# Altium PCB PCB.PcbDoc
Units mm, origin at the board's own origin, x right, y up, seen from the top; angles counter-clockwise.
Board outline 50 x 50 mm, 6 copper layers (L1, L2, L3, L4, L5, L6), stack 0.816 mm thick; 41 components, 27 nets, 119 pads, 94 vias.
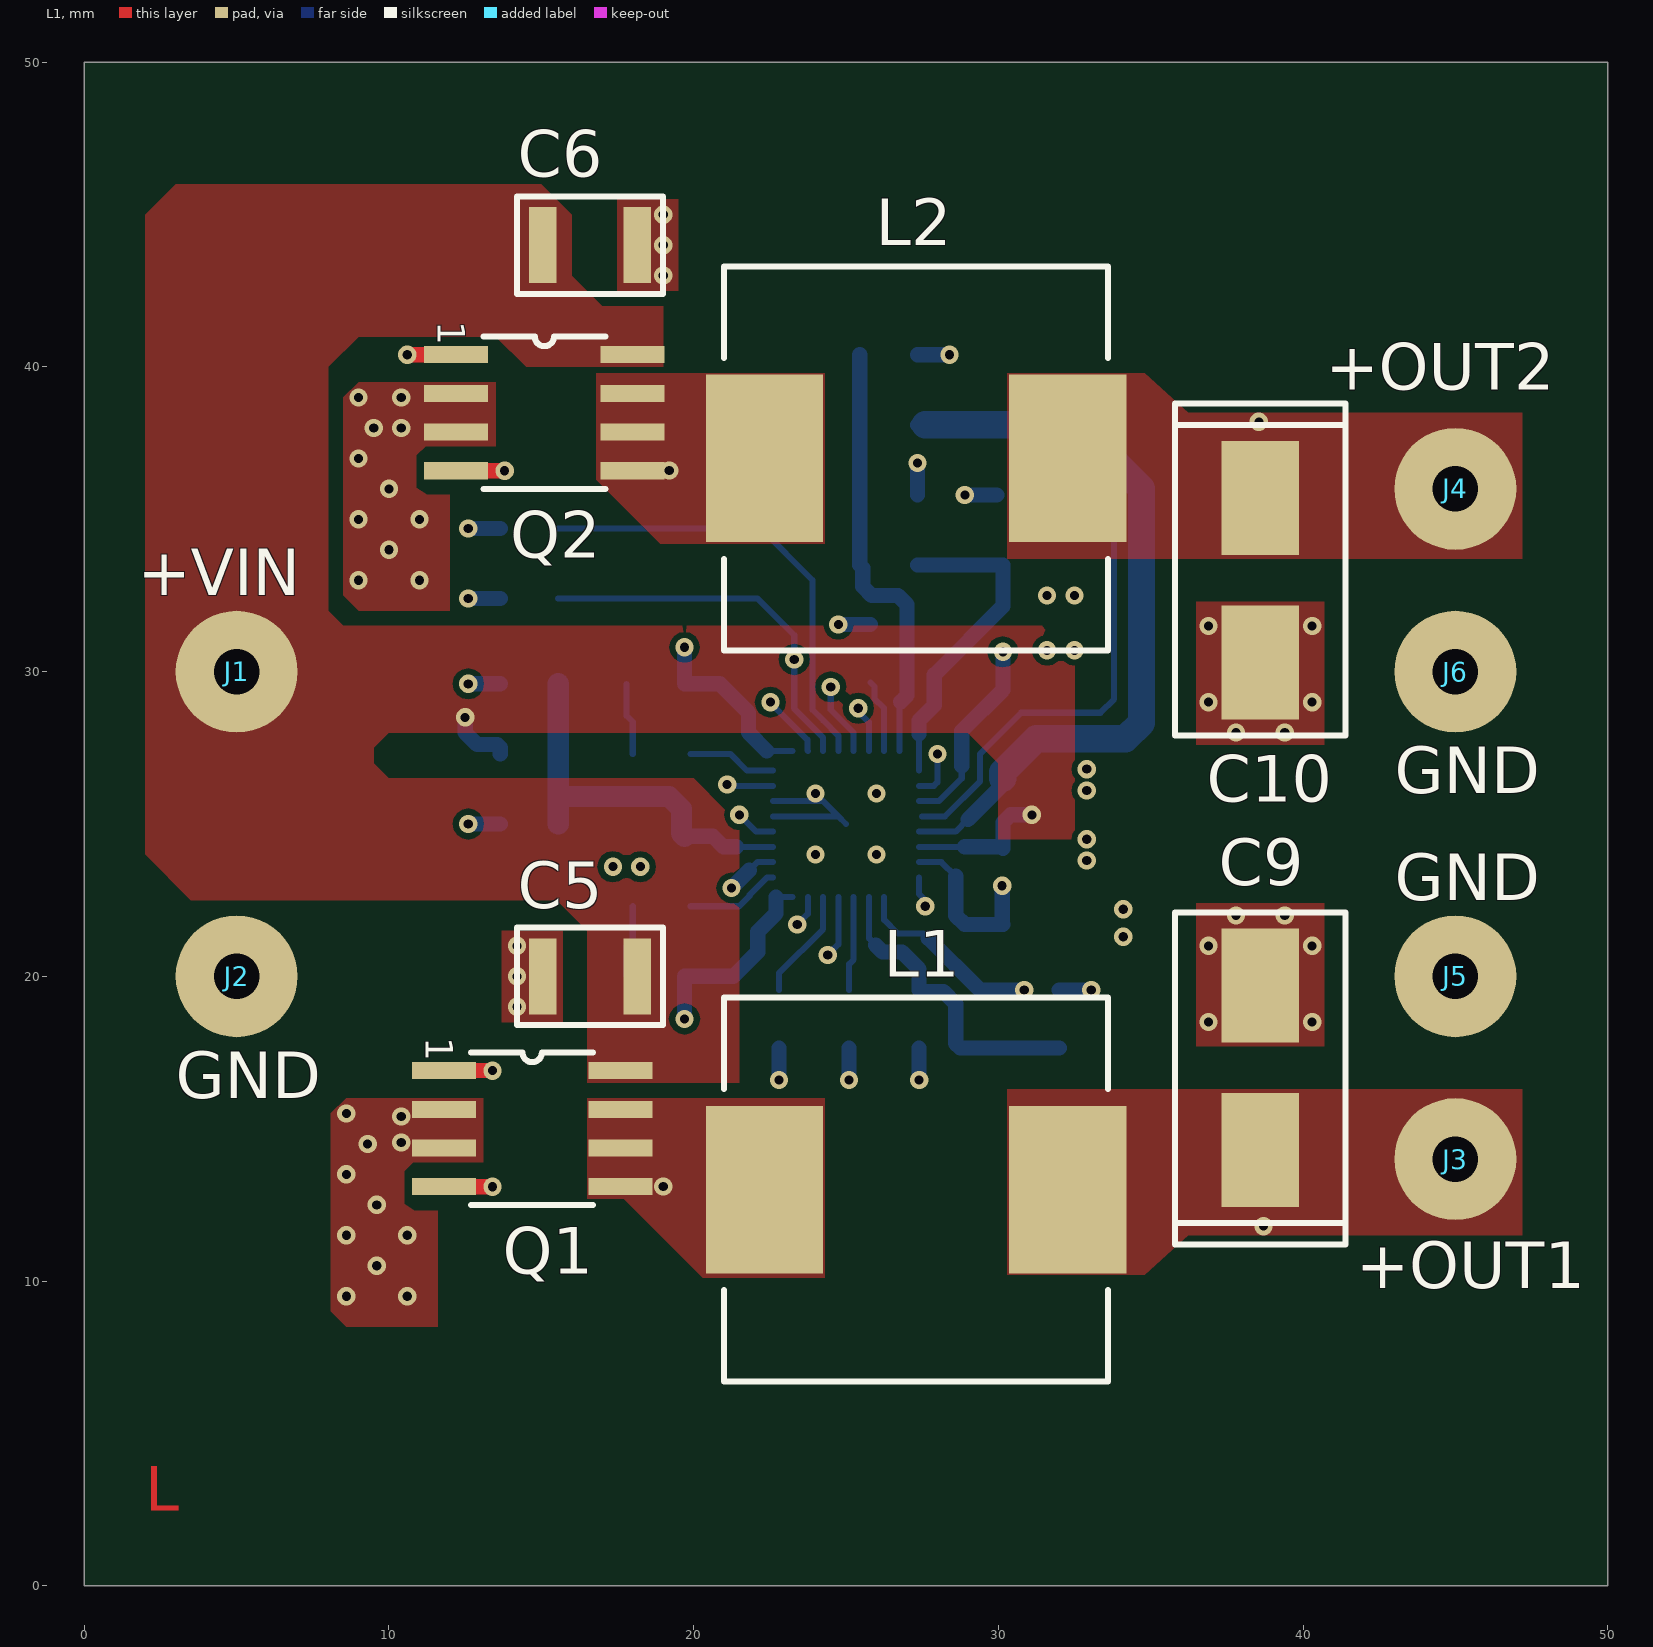
[diagram p0: L1 view]
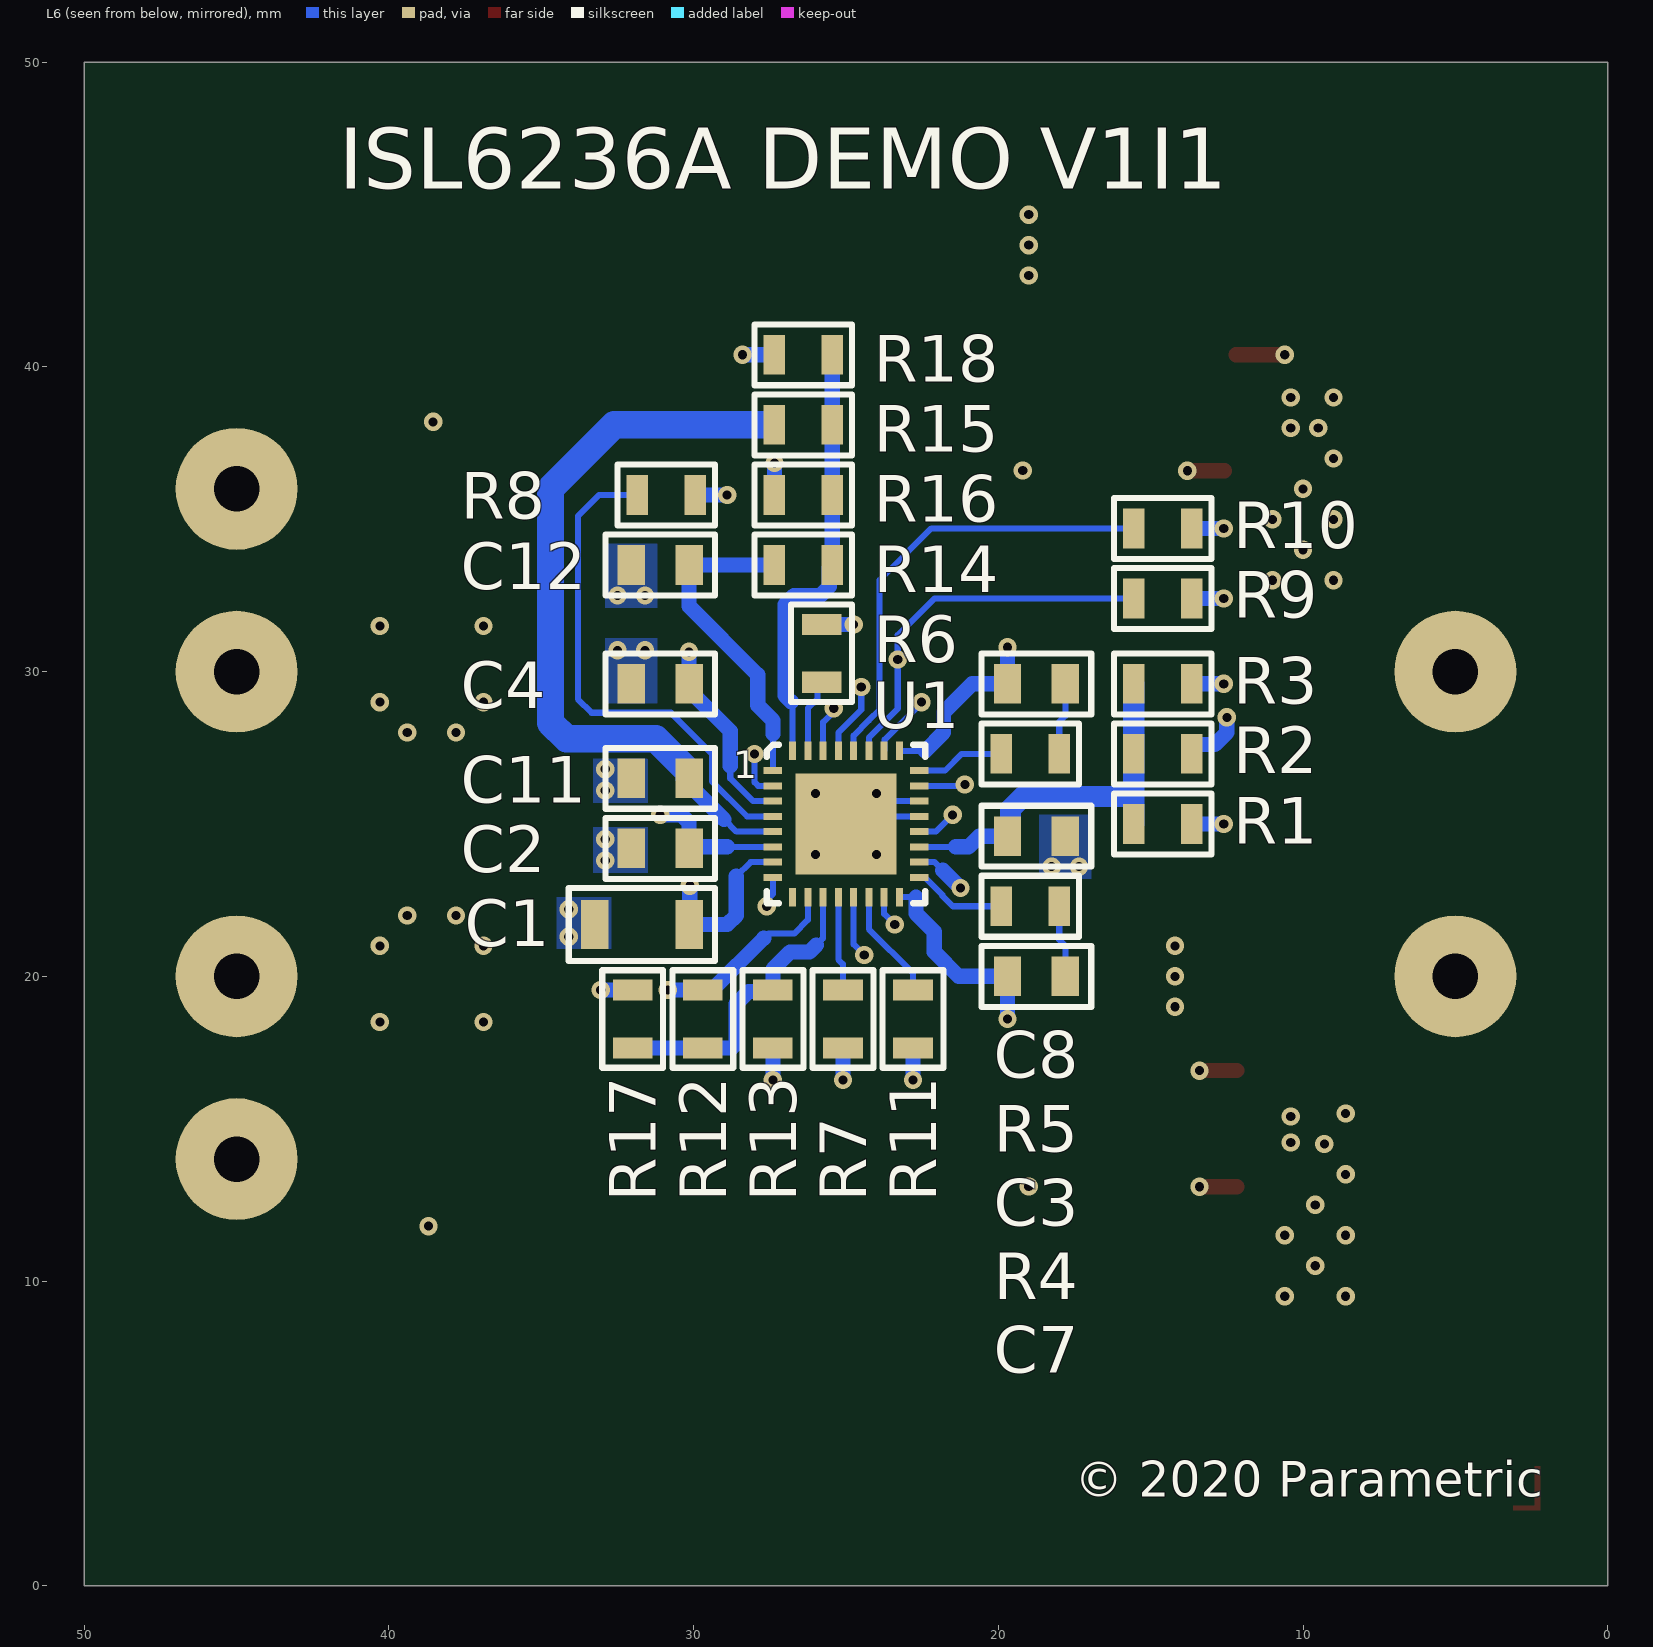
[diagram p1: L6 view, seen from below]
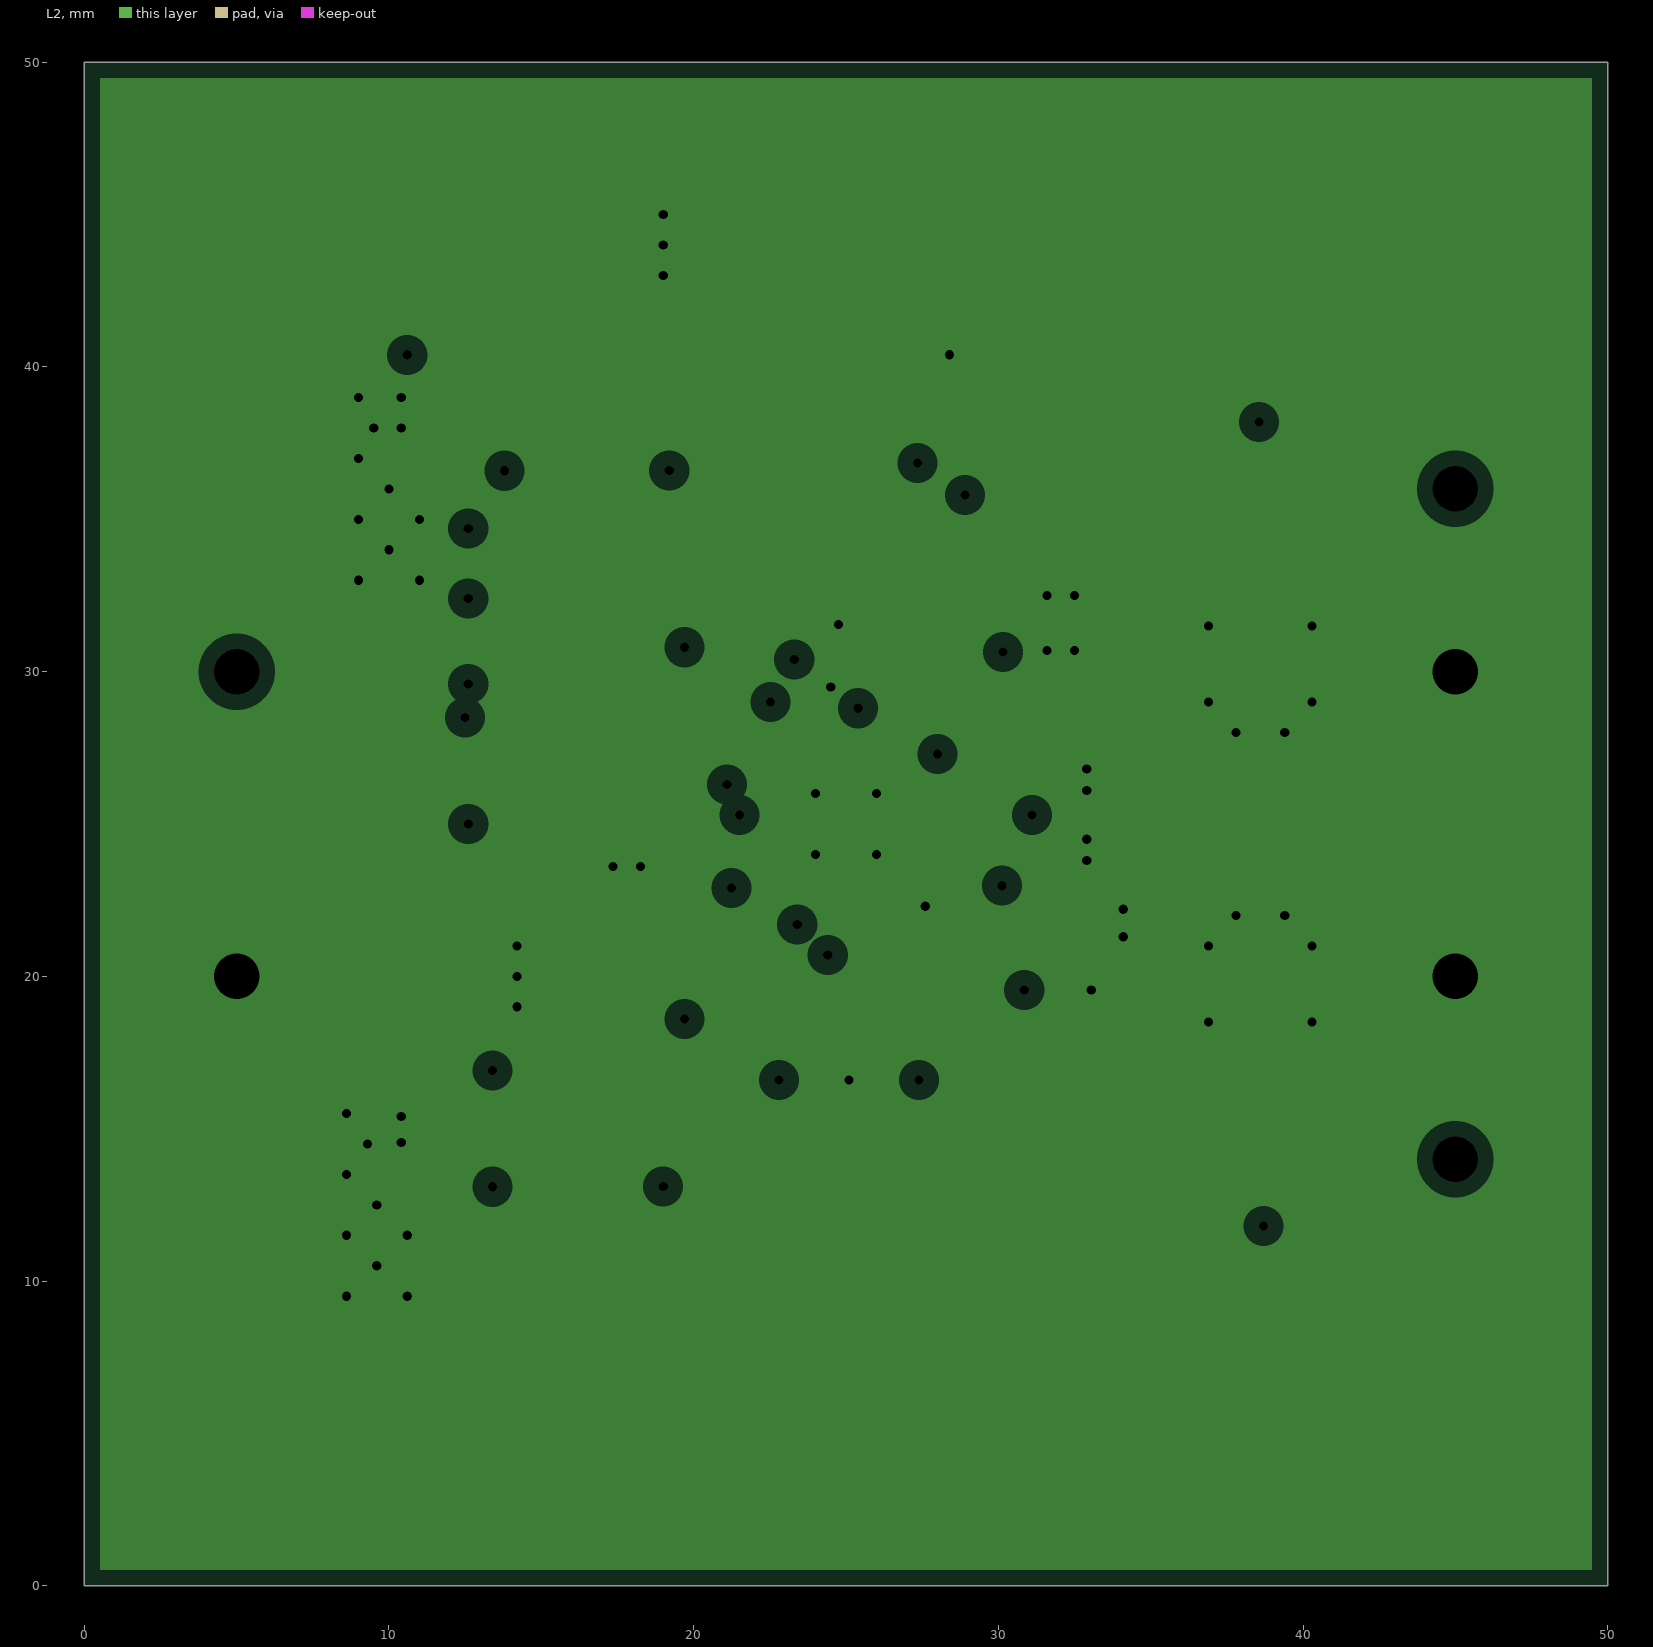
[diagram p2: L2, clearances drawn from the general rule]
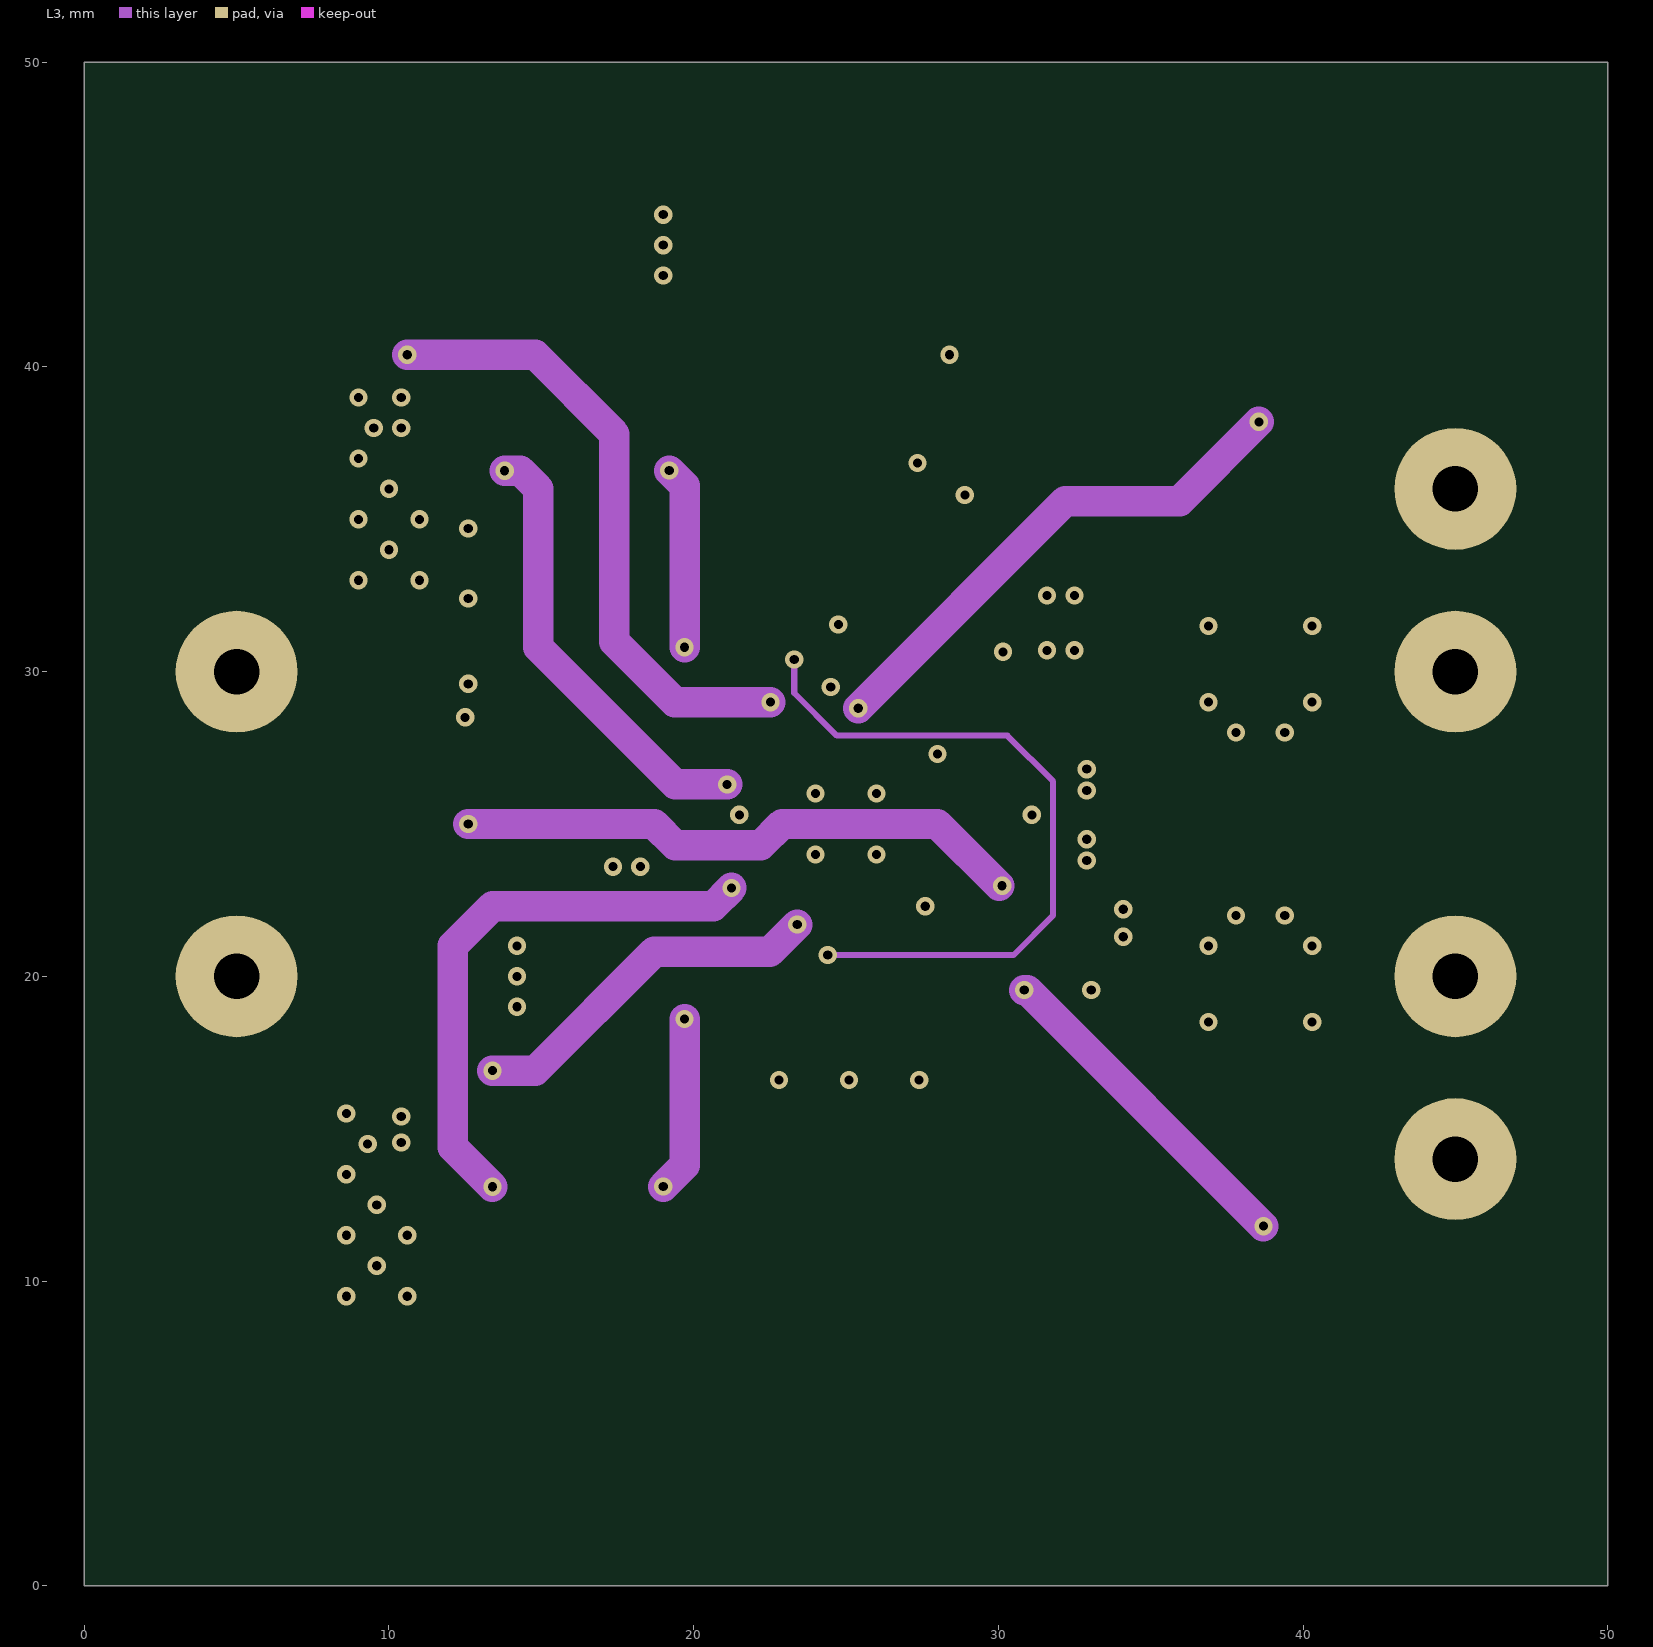
[diagram p3: L3]
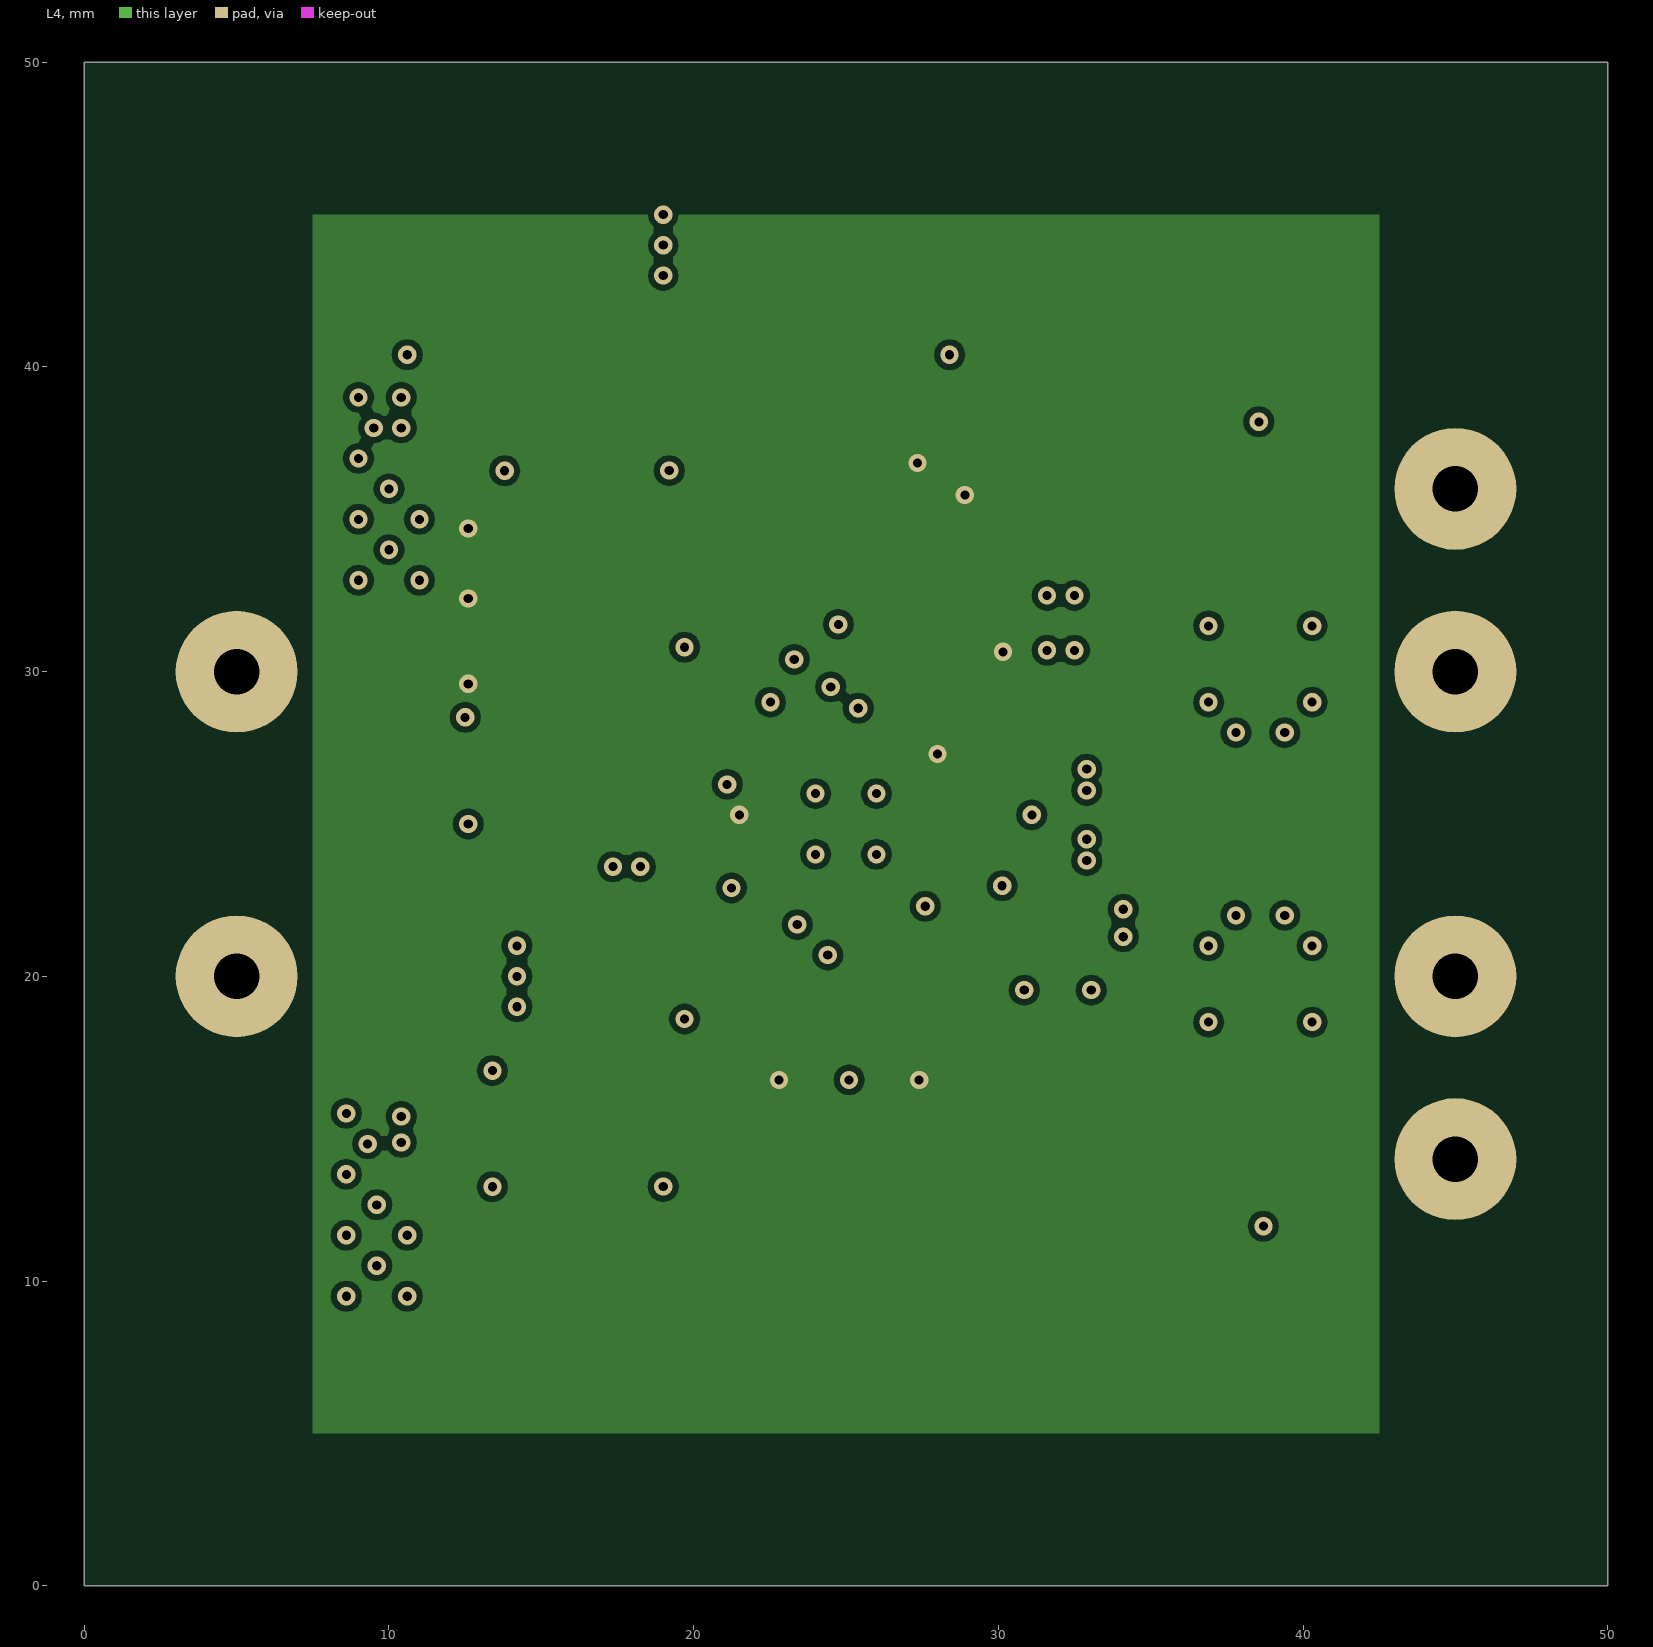
[diagram p4: L4]
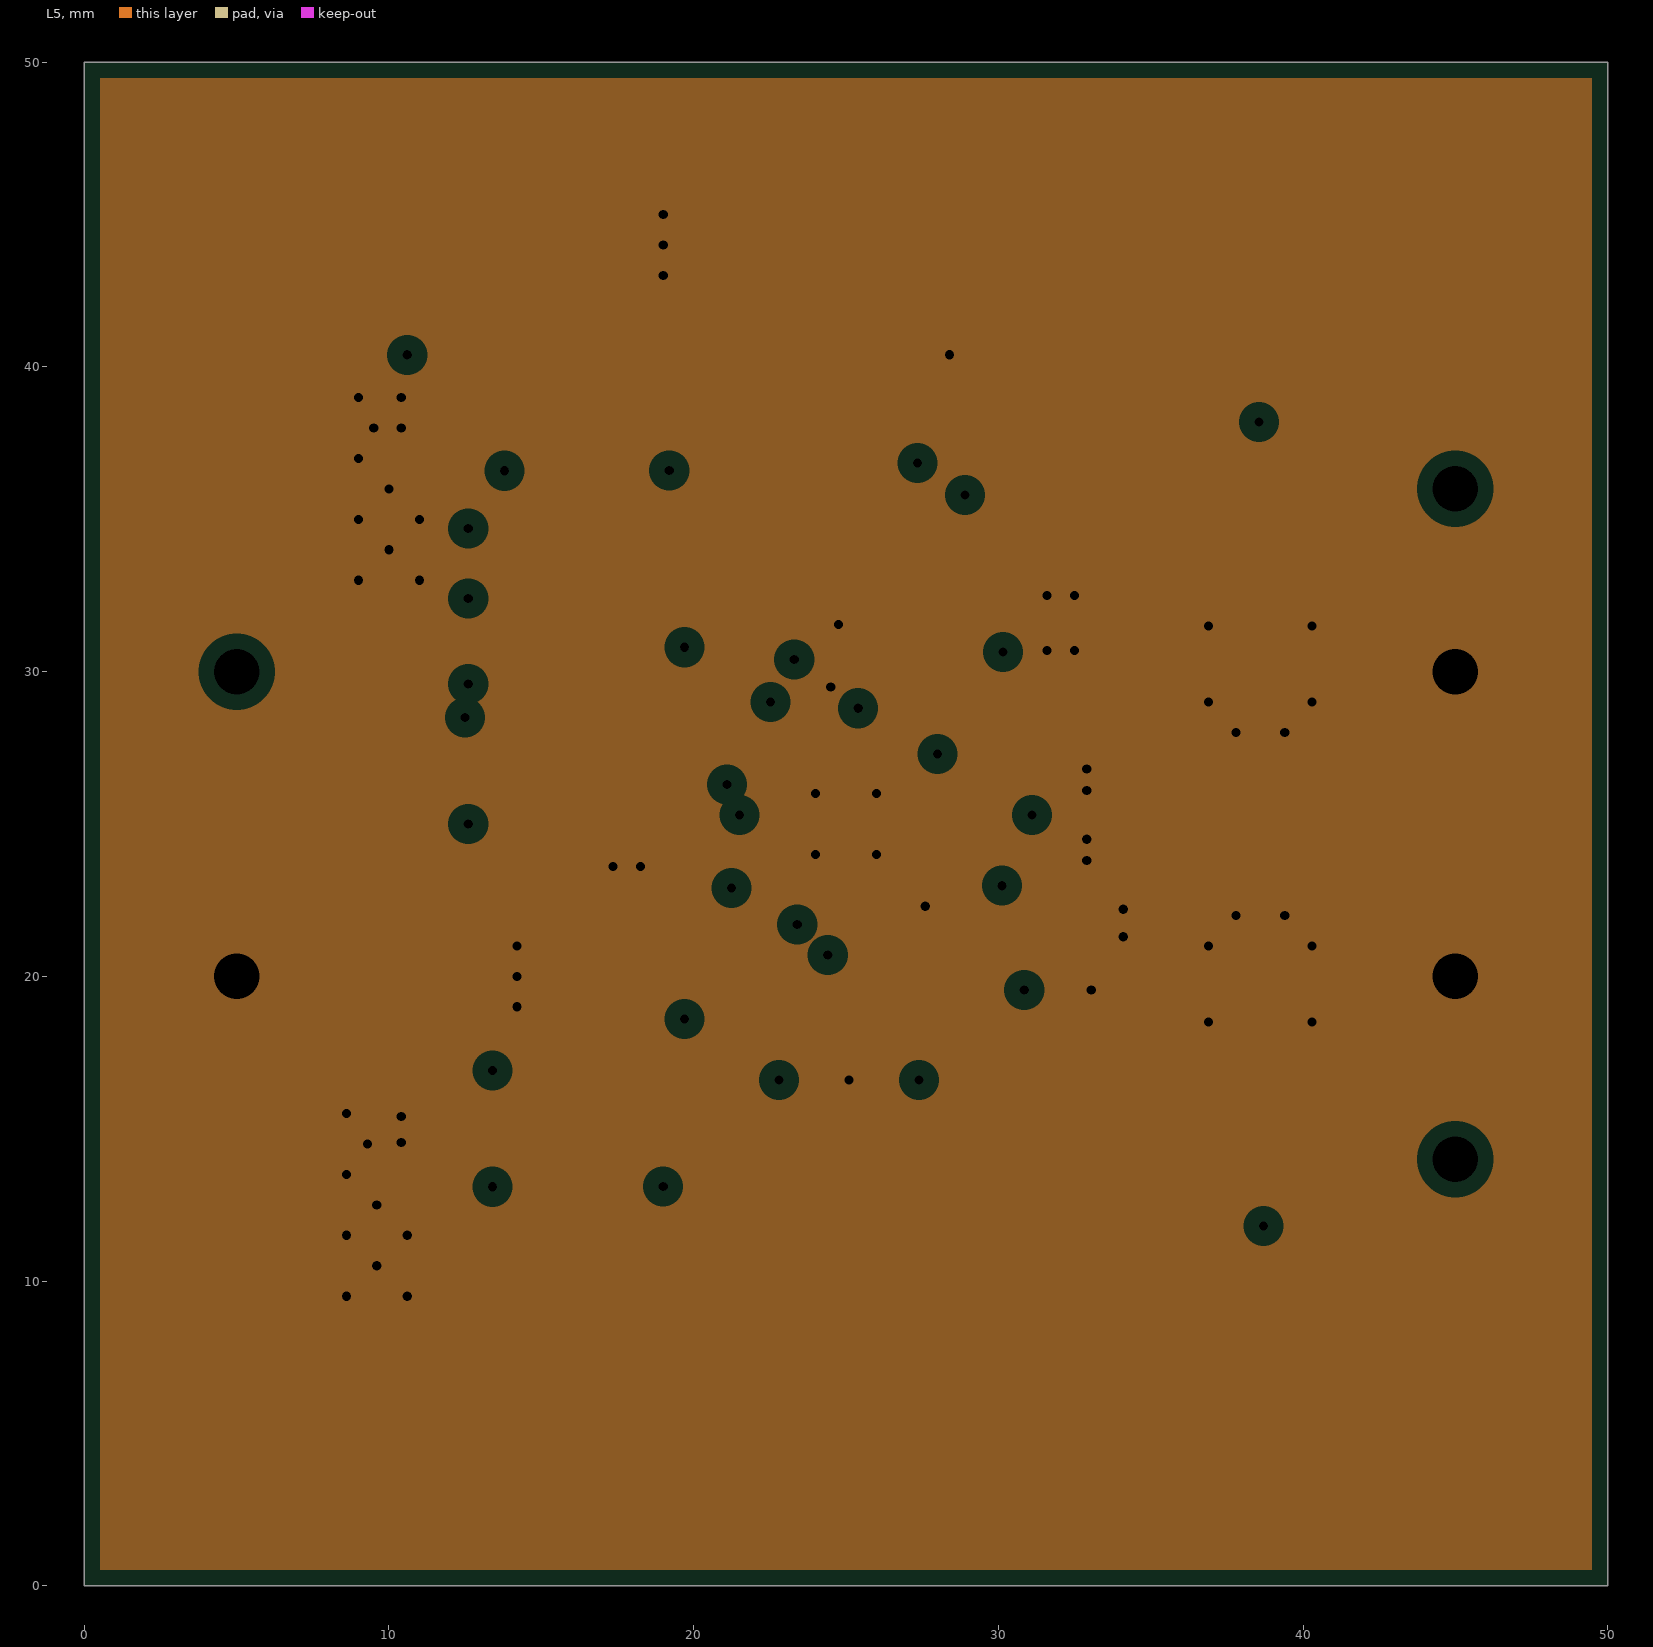
[diagram p5: L5, clearances drawn from the general rule]

## Layer stack, top to bottom
Top Solder: solder mask 0.0102, Solder Resist, Dk 3.5
L1: signal copper 0.0356
Dielectric 2: prepreg 0.0711, PP-006, Dk 4.1
L2: plane copper 0.035, net GND
Dielectric 4: prepreg 0.0711, PP-006, Dk 4.1
L3: signal copper 0.035
Dielectric 1: dielectric 0.32, FR-4, Dk 4.8
L4: signal copper 0.035
Dielectric 5: prepreg 0.0711, PP-006, Dk 4.1
L5: plane copper 0.035, net GND
Dielectric 3: prepreg 0.0711, PP-006, Dk 4.1
L6: signal copper 0.0356
Bottom Solder: solder mask 0.0102, Solder Resist, Dk 3.5

## Board outline
0,0 50,0 50,50 0,50

## Design rules (kind name [scope] priority, off if disabled: settings)
Clearance [All] p1: gap=0.2 ignorepadtopadclearanceinfootprint=FALSE
ComponentClearance [All] p1: gap=0.099 collisioncheckmode=3 verticalgap=0.254 showdistances=FALSE
MinimumSolderMaskSliver [All] p1: minsoldermaskwidth=0.1
PlaneClearance [All] p1: clearance=0.508
PlaneConnect [All] p1: pad.planeconnectstyle=Relief pad.reliefexpansion=0.508 pad.reliefentries=4 pad.reliefconductorwidth=1 pad.reliefairgap=0.5 via.planeconnectstyle=Direct via.reliefexpansion=0.508 via.reliefentries=4 via.reliefconductorwidth=0.254 via.reliefairgap=0.254
PolygonConnect [All] p1: connectstyle=Direct reliefconductorwidth=0.254 reliefentries=4 polygonreliefangle="90 Angle" airgapwidth=0.254
RoutingVias [All] p1: holewidth=0.3 width=0.6 viastyle="Through Hole" minholewidth=0.3 minwidth=0.6 maxholewidth=0.3 maxwidth=0.6
SilkToSolderMaskClearance [IsPad] p1: minsilkscreentomaskgap=0.1 clearancetoexposedcopper=TRUE
SolderMaskExpansion [All] p1: expansion=0.102 istentingtop=FALSE
Width [All] p1: maxlimit=10 minlimit=0.2 preferedwidth=0.2
25 further rules are at their usual default settings.

## Components (designator, comment, footprint, x,y, rotation, side; value= is the part's Value field where it differs from the comment)
C1 "4.7uF, 50V" C1206 31.7,21.7 r180 bottom
C2 "1uF 50V" C0805 31.1,24.2 r180 bottom
C3 "1uF 50V" C0805 18.75,24.6 r0 bottom
C4 "1uF 50V" C0805 31.1,29.6 r180 bottom
C5 "10uF, 35V" C1210 16.6,20 r0 top
C6 "10uF, 35V" C1210 16.6,44 r180 top
C7 "100nF" C0805 18.75,20 r180 bottom
C8 "220nF" C0805 18.75,29.6 r0 bottom
C9 "330uF, 10V" 7343-43 38.6,17 r90 top
C10 "330uF, 10V" 7343-43 38.6,33 r270 top
C11 "10nF" C0805 31.1,26.5 r0 bottom
C12 "100nF" C0805 31.1,33.5 r0 bottom
J1 "4MMx1.5MM" PAD_WITH_HOLE_4mmx1.5mm 5,30 r0 top
J2 "4MMx1.5MM" PAD_WITH_HOLE_4mmx1.5mm 5,20 r0 top
J3 "4MMx1.5MM" PAD_WITH_HOLE_4mmx1.5mm 45,14 r0 top
J4 "4MMx1.5MM" PAD_WITH_HOLE_4mmx1.5mm 45,36 r0 top
J5 "4MMx1.5MM" PAD_WITH_HOLE_4mmx1.5mm 45,20 r0 top
J6 "4MMx1.5MM" PAD_WITH_HOLE_4mmx1.5mm 45,30 r0 top
L1 "3.3uH, DR125-3R3-R" DR125 27.3,13 r180 top
L2 "2.2uH, 513-1662-1-ND" DR125 27.3,37 r0 top
Q1 "SI4816BDY-T1-E3" SO-8 14.7,15 r0 top
Q2 "SI4816BDY-T1-E3" SO-8 15.1,38.5 r0 top
R1 "0R" R0805 14.6,25 r180 bottom
R2 "0R" R0805 14.6,27.3 r0 bottom
R3 "10R" R0805 14.6,29.6 r180 bottom
R4 "1R" R0805 18.95,22.3 r0 bottom
R5 "1R" R0805 18.95,27.3 r180 bottom
R6 "200k" R0805 25.8,30.6 r90 bottom
R7 "200k" R0805 25.1,18.6 r90 bottom
R8 "10K" R0805 30.9,35.8 r180 bottom
R9 "200k" R0805 14.6,32.4 r180 bottom
R10 "200k" R0805 14.6,34.7 r180 bottom
R11 "10K" R0805 22.8,18.6 r270 bottom
R12 "DNF" R0805 29.7,18.6 r90 bottom
R13 "0R" R0805 27.4,18.6 r270 bottom
R14 "DNF" R0805 26.4,33.5 r0 bottom
R15 "0R" R0805 26.4,38.1 r0 bottom
R16 "DNF" R0805 26.4,35.8 r0 bottom
R17 "DNF" R0805 32,18.6 r270 bottom
R18 "DNF" R0805 26.4,40.4 r180 bottom
U1 "ISL6236AIRZ" L32.5x5B 25,25 r180 bottom

## Footprints (in the part's own frame and the unit in brackets; to place one, negate y for a bottom-side part, rotate by r counter-clockwise, add the part's x,y. Pads: shape width x height; smd on the part's side, far side on the other; paste and mask are expansions set on the pad)
7343-43 [mm]
  rect 3.75x2.55 smd: 1(-2.7,0) 2(2.7,0)
  silkscreen extent -5.8,-2.8 5.1,2.8
C0805 [mm]
  rect 0.9x1.3 smd: 1(-0.95,0) 2(0.95,0)
  silkscreen extent -1.8,-1 1.8,1
C1206 [mm]
  rect 0.9x1.6 smd: 1(-1.55,0) 2(1.55,0)
  silkscreen extent -2.4,-1.2 2.4,1.2
C1210 [mm]
  rect 0.9x2.5 smd: 1(-1.55,0) 2(1.55,0)
  silkscreen extent -2.4,-1.6 2.4,1.6
DR125 [mm]
  rect 3.85x5.5 smd: 1(-4.975,0) 2(4.975,0)
  silkscreen extent -6.3,-6.3 6.3,6.3
L32.5x5B [mm]
  rect 0.6x0.23 smd mask+0.051: 1(-2.4,1.75) 2(-2.4,1.25) 3(-2.4,0.75) 4(-2.4,0.25) 5(-2.4,-0.25) 6(-2.4,-0.75) 7(-2.4,-1.25) 8(-2.4,-1.75) 17(2.4,-1.75) 18(2.4,-1.25) 19(2.4,-0.75) 20(2.4,-0.25) 21(2.4,0.25) 22(2.4,0.75) 23(2.4,1.25) 24(2.4,1.75)
  rect 0.23x0.6 smd mask+0.051: 9(-1.75,-2.4) 10(-1.25,-2.4) 11(-0.75,-2.4) 12(-0.25,-2.4) 13(0.25,-2.4) 14(0.75,-2.4) 15(1.25,-2.4) 16(1.75,-2.4) 25(1.75,2.4) 26(1.25,2.4) 27(0.75,2.4) 28(0.25,2.4) 29(-0.25,2.4) 30(-0.75,2.4) 31(-1.25,2.4) 32(-1.75,2.4)
  rect 3.3x3.3 smd mask+0.051: 33(0,0)
  silkscreen extent -2.6,-2.6 2.6,2.6
PAD_WITH_HOLE_4mmx1.5mm [mm]
  round 4 hole 1.5: 1(0,0)
R0805 [mm]
  rect 0.7x1.3 smd: 1(-0.95,0) 2(0.95,0)
  silkscreen extent -1.6,-1 1.6,1
SO-8 [mm]
  rect 2.1x0.559 smd: 1(-2.9,1.905) 2(-2.9,0.635) 3(-2.9,-0.635) 4(-2.9,-1.905) 5(2.9,-1.905) 6(2.9,-0.635) 7(2.9,0.635) 8(2.9,1.905)
  silkscreen extent -2,-2.5 2,2.5

## Part data
C1: library part C3216X5R1H475K160AB, "C Series 1206 4.7 uF 50 V ±10 % Tolerance X5R SMT Multilayer Ceramic Capacitor", Capacitance=4.7uF, Case Code (Imperial)=1206, Case Code (Metric)=3216, Dielectric=X5R, Dielectric Material=Ceramic, Manufacturer=TDK, Max Operating Temperature=85°C, Min Operating Temperature=-55°C, Package Quantity=1, Supplier Part Number 1=445-5994-1-ND, Tolerance=10%, Voltage Rating=50V, Case/Package=1206, Category="Ceramic Capacitors", ComponentLink1Description=https://datasheet.ciiva.com/24216/c3216x5r1h475k160ab-265269-24216325.pdf?src-supplier=Mouser, ComponentLink1URL=https://datasheet.ciiva.com/24216/c3216x5r1h475k160ab-265269-24216325.pdf?src-supplier=Mouser, ComponentLink2Description=https://datasheet.ciiva.com/6286/tdkmlcccaprange-6286230.pdf?src-supplier=Digi-Key, ComponentLink2URL=https://datasheet.ciiva.com/6286/tdkmlcccaprange-6286230.pdf?src-supplier=Digi-Key, ComponentLink3Description=https://datasheet.ciiva.com/6286/tdkmlcccaprange-6286233.pdf?src-supplier=Digi-Key, ComponentLink3URL=https://datasheet.ciiva.com/6286/tdkmlcccaprange-6286233.pdf?src-supplier=Digi-Key, ComponentLink4Description=https://datasheet.ciiva.com/6286/tdkmlcccaprange-6286236.pdf?src-supplier=Digi-Key, ComponentLink4URL=https://datasheet.ciiva.com/6286/tdkmlcccaprange-6286236.pdf?src-supplier=Digi-Key, Composition=Ceramic, Depth=1.6mm, Height=1.6mm, Lead Free="Lead Free", Length=3.2mm, Manufacturer Part Number=C3216X5R1H475K160AB, Mount="Surface Mount", Packaging="Tape and Reel", Pricing 1="1=0.86000, 10=0.63500, 50=0.50820, 100=0.43560, 500=0.34486, 1000=0.29040 (USD)", RoHS=Yes, Stock 1=6706, Supplier 1=Digi-Key, Termination=SMD/SMT, Thickness=0.071inch, Voltage Rating (DC)=50V, Weight=0.000571oz, Width=1.6mm
C2 C3 C4: library part C0805C105K5RACTU, "CAP CER 1UF 50V X7R 0805", Capacitance=1uF, Case Code (Imperial)=0805, Case Code (Metric)=2012, Dielectric=X7R, Dielectric Material=Ceramic, Manufacturer=KEMET, Max Operating Temperature=125°C, Min Operating Temperature=-55°C, Package Quantity=1, Supplier Part Number 1=399-7409-1-ND, Tolerance=10%, Voltage=50V, Case/Package=0805, Category="Ceramic Capacitors", ComponentLink1Description=https://datasheet.ciiva.com/7842/1732744-7842192.pdf?src-supplier=Element14, ComponentLink1URL=https://datasheet.ciiva.com/7842/1732744-7842192.pdf?src-supplier=Element14, ComponentLink2Description=https://datasheet.ciiva.com/5408/kem-c1002-x7r-smd-5408569.pdf?src-supplier=Mouser, ComponentLink2URL=https://datasheet.ciiva.com/5408/kem-c1002-x7r-smd-5408569.pdf?src-supplier=Mouser, ComponentLink3Description=https://datasheet.ciiva.com/22700/1851736-22700523.pdf?src-supplier=Element14, ComponentLink3URL=https://datasheet.ciiva.com/22700/1851736-22700523.pdf?src-supplier=Element14, Contact Plating=Tin,Matte, Depth=1.25mm, Height=1.25mm, Length=2mm, Manufacturer Part Number=C0805C105K5RACTU, Mount="Surface Mount,PCB", Packaging="Tape and Reel", Pricing 1="1=0.38000, 10=0.26500, 50=0.18540, 100=0.15900, 500=0.11924, 1000=0.10070 (USD)", REACH SVHC="No SVHC", RoHS=Yes, Stock 1=143406, Supplier 1=Digi-Key, Termination=SMD/SMT, Thickness=0.055inch, Voltage Rating=50V, Voltage Rating (DC)=50V, Width=0.049inch
C5 C6: library part C1210C106K6PACTU, "KEMET - C1210C106K6PACTU - SMD Multilayer Ceramic Capacitor, 10 µF, 35 V, 1210 [3225 Metric], ± 10%, X5R, C Series KEMET", Capacitance=10uF, Case Code (Imperial)=1210, Case Code (Metric)=3225, Dielectric=X5R, Dielectric Material=Ceramic, Manufacturer=KEMET, Max Operating Temperature=85°C, Min Operating Temperature=-55°C, Supplier Part Number 1=399-12070-1-ND, Tolerance=10%, Voltage=35V, Case/Package=1210, Category="Ceramic Capacitors", ComponentLink1Description=http://www.alliedelec.com/m/d/f3c02ddb98afa3dd1adcb801109671e9.pdf?src-supplier=Allied+Electronics, ComponentLink1URL=http://www.alliedelec.com/m/d/f3c02ddb98afa3dd1adcb801109671e9.pdf?src-supplier=Allied+Electronics, ComponentLink2Description=http://www.farnell.com/datasheets/2741192.pdf?src-supplier=Farnell, ComponentLink2URL=http://www.farnell.com/datasheets/2741192.pdf?src-supplier=Farnell, ComponentLink3Description=https://api.kemet.com/component-edge/download/datasheet/C1210C106K6PAC7800.pdf?src-supplier=Digi-Key, ComponentLink3URL=https://api.kemet.com/component-edge/download/datasheet/C1210C106K6PAC7800.pdf?src-supplier=Digi-Key, ComponentLink4Description=http://www.farnell.com/datasheets/2741192.pdf?src-supplier=Newark, ComponentLink4URL=http://www.farnell.com/datasheets/2741192.pdf?src-supplier=Newark, ComponentLink5Description=http://www.kemet.com/docfinder?Partnumber=C1210C106K6PAC7800&src-supplier=Digi-Key, ComponentLink5URL=http://www.kemet.com/docfinder?Partnumber=C1210C106K6PAC7800&src-supplier=Digi-Key, Depth=2.5mm, Dissipation Factor=2.5%, Height=1.9mm, Lead Free="Lead Free", Length=0.126inch, Manufacturer Part Number=C1210C106K6PACTU, Mount="Surface Mount", Packaging="Tape and Reel", Pricing 1="1=0.78000, 10=0.57700, 50=0.46180, 100=0.39580, 500=0.31336, 1000=0.26388 (USD)", RoHS=Yes, Stock 1=38018, Supplier 1=Digi-Key, Termination=Solder, Thickness=0.083inch, Voltage Rating=35V, Voltage Rating (DC)=35V, Width=0.098inch
C7 C12: library part C0805C104K5RACTU, "Cap Ceramic 0.1uF 50V X7R 10% SMD 2.0 x 1.2 mm 125 C Paper T/R", Case Code (Imperial)=0805, Case Code (Metric)=2012, Dielectric=X7R, Dielectric Material=Ceramic, Manufacturer=KEMET, Max Operating Temperature=125°C, Min Operating Temperature=-55°C, Package Quantity=4000, Supplier Part Number 1=399-1170-1-ND, Tolerance=10%, Voltage=500V, Voltage Rating=50V, Capacitance=100nF, Case/Package=0805, Category="Ceramic Capacitors", ComponentLink1Description=https://datasheet.ciiva.com/14589/70095383-14589048.pdf?src-supplier=Allied+Electronics, ComponentLink1URL=https://datasheet.ciiva.com/14589/70095383-14589048.pdf?src-supplier=Allied+Electronics, ComponentLink2Description=https://datasheet.ciiva.com/28682/1851736-28682232.pdf?src-supplier=Element14, ComponentLink2URL=https://datasheet.ciiva.com/28682/1851736-28682232.pdf?src-supplier=Element14, ComponentLink3Description=https://datasheet.ciiva.com/32431/slceramic-chip-condensers-e-32431755.pdf?src-supplier=Distrelec, ComponentLink3URL=https://datasheet.ciiva.com/32431/slceramic-chip-condensers-e-32431755.pdf?src-supplier=Distrelec, ComponentLink4Description=https://datasheet.ciiva.com/18410/70095383-18410815.pdf?src-supplier=Allied+Electronics, ComponentLink4URL=https://datasheet.ciiva.com/18410/70095383-18410815.pdf?src-supplier=Allied+Electronics, Contact Plating=Tin,Matte, Depth=1.25mm, Height=0.9mm, Lead Pitch=0.75mm, Length=2mm, Manufacturer Part Number=C0805C104K5RACTU, Mount="Surface Mount,PCB", Number of Pins=2, Packaging="Tape and Reel", Pricing 1="1=0.16000, 10=0.11500, 50=0.06540, 100=0.05420, 500=0.03802, 1000=0.03147 (USD)", Radiation Hardening=No, REACH SVHC="No SVHC", RoHS=Yes, Stock 1=2631110, Supplier 1=Digi-Key, Termination=SMD/SMT, Thickness=0.035inch, Voltage Rating (DC)=50V, Width=1.2mm
C8: library part C0805C224K5RACTU, "CAP CER 0.22UF 50V X7R 0805", Case Code (Imperial)=0805, Case Code (Metric)=2012, Dielectric=X7R, Dielectric Material=Ceramic, Manufacturer=KEMET, Max Operating Temperature=125°C, Min Operating Temperature=-55°C, Package Quantity=1, Supplier Part Number 1=399-3491-6-ND, Tolerance=10%, Voltage=50V, Capacitance=220nF, Case/Package=0805, Category="Ceramic Capacitors", ComponentLink1Description=https://datasheet.ciiva.com/7842/kem-c1002-x7r-smd-7842582.pdf?src-supplier=Element14, ComponentLink1URL=https://datasheet.ciiva.com/7842/kem-c1002-x7r-smd-7842582.pdf?src-supplier=Element14, ComponentLink2Description=https://datasheet.ciiva.com/18193/getdatasheetpartid-304413-18193686.pdf?src-supplier=Verical, ComponentLink2URL=https://datasheet.ciiva.com/18193/getdatasheetpartid-304413-18193686.pdf?src-supplier=Verical, ComponentLink3Description=https://datasheet.ciiva.com/28682/1851736-28682316.pdf?src-supplier=Element14, ComponentLink3URL=https://datasheet.ciiva.com/28682/1851736-28682316.pdf?src-supplier=Element14, Depth=1.25mm, Dissipation Factor=2.5%, Height=1.1mm, Lead Pitch=0.75mm, Length=2mm, Manufacturer Part Number=C0805C224K5RACTU, Mount="Surface Mount,PCB", Packaging="Tape and Reel", Pricing 1="1=0.19000, 10=0.13300, 50=0.07560, 100=0.06260, 500=0.04392, 1000=0.03636 (USD)", Radiation Hardening=No, REACH SVHC="No SVHC", RoHS=Yes, Stock 1=971801, Supplier 1=Digi-Key, Termination=SMD/SMT, Thickness=0.055inch, Voltage Rating=50V, Voltage Rating (DC)=50V, Width=0.049inch
C9 C10: library part T530X337M010ATE004, "Tantalum Capacitors - Polymer SMD 330uF 10volts 20%", Capacitance=330uF, Case Code (Imperial)=2917, Case Code (Metric)=7343, ESR (Equivalent Series Resistance)=4mR, Leakage Current=330uA, Manufacturer=KEMET, Max Operating Temperature=125°C, Min Operating Temperature=-55°C, Package Quantity=500, Ripple Current=8.2A, Supplier Part Number 1=399-10378-1-ND, Tolerance=20%, Voltage=10V, Case/Package=2917, Category="Polymer Capacitors", ComponentLink1Description=https://datasheet.ciiva.com/11794/0900766b80deaa91-11794477.pdf?src-supplier=RSComponents, ComponentLink1URL=https://datasheet.ciiva.com/11794/0900766b80deaa91-11794477.pdf?src-supplier=RSComponents, ComponentLink2Description=https://datasheet.ciiva.com/14593/70096008-14593753.pdf?src-supplier=Allied+Electronics, ComponentLink2URL=https://datasheet.ciiva.com/14593/70096008-14593753.pdf?src-supplier=Allied+Electronics, Depth=4.3mm, Dissipation Factor=8%, Features="General Purpose", Height=4mm, Height - Seated (Max)=0.169inch, Length=7.3mm, Life (Hours)=2000Hour, Manufacturer Part Number=T530X337M010ATE004, Mount="Surface Mount,PCB", Packaging="Tape and Reel", Polarity=Polar, Pricing 1="1=6.56000, 10=5.83000, 50=5.10120, 100=4.66400 (USD)", REACH SVHC="No SVHC", RoHS=Yes, Stock 1=1977, Supplier 1=Digi-Key, Termination=SMD/SMT, Voltage Rating=10V, Voltage Rating (DC)=10V, Width=4.3mm
C11: library part C0805F103K5RACTU, "KEMET - C0805F103K5RACTU - SMD Multilayer Ceramic Capacitor, FO-CAP, 10000 pF, 50 V, 0805 [2012 Metric], ± 10%, X7R", Case Code (Imperial)=0805, Case Code (Metric)=2012, Dielectric=X7R, Dielectric Material=Ceramic, Manufacturer=KEMET, Max Operating Temperature=125°C, Min Operating Temperature=-55°C, Package Quantity=4000, Supplier Part Number 1=399-5107-1-ND, Tolerance=10%, Voltage=50V, Capacitance=10nF, Case/Package=0805, Category="Ceramic Capacitors", ComponentLink1Description=https://datasheet.ciiva.com/146/docfinderpartnumber-c0805f103k5ractu-146278.pdf?src-supplier=Digi-Key, ComponentLink1URL=https://datasheet.ciiva.com/146/docfinderpartnumber-c0805f103k5ractu-146278.pdf?src-supplier=Digi-Key, ComponentLink2Description=https://datasheet.ciiva.com/7842/48829-7842407.pdf?src-supplier=Element14, ComponentLink2URL=https://datasheet.ciiva.com/7842/48829-7842407.pdf?src-supplier=Element14, ComponentLink3Description=https://datasheet.ciiva.com/7842/48829-7842408.pdf?src-supplier=Element14, ComponentLink3URL=https://datasheet.ciiva.com/7842/48829-7842408.pdf?src-supplier=Element14, Depth=1.25mm, Height=0.9mm, Lead Pitch=0.75mm, Length=2mm, Manufacturer Part Number=C0805F103K5RACTU, Mount="Surface Mount", Number of Pins=2, Packaging="Tape and Reel", Pricing 1="1=0.33000, 10=0.22600, 50=0.15800, 100=0.13550, 500=0.10162, 1000=0.08580 (USD)", Radiation Hardening=No, REACH SVHC="No SVHC", RoHS=Yes, Stock 1=93831, Supplier 1=Digi-Key, Termination=SMD/SMT, Thickness=0.039inch, Voltage Rating=50V, Voltage Rating (DC)=50V, Width=1.25mm
J1 J2 J3 J4 J5 J6: library part PAD_WITH_HOLE_4mmx1.5mm, "Pad with a hole 4mm x 1.5mm"
L1: library part DR125-3R3-R, "COILTRONICS         DR125-3R3-R             Surface Mount Power Inductor, DR Series, 3.3 H, 9.26 A, 12.7 A, Shielded", Case/Package=0125, DC Resistance (DCR)=6.3mR, Inductance=3.3uH, Inductance Tolerance=20%, Manufacturer="Eaton Coiltronics", Max DC Current=12.7A, Max Operating Temperature=125°C, Min Operating Temperature=-40°C, Package Quantity=600, RMS Current (Irms)=9.26A, Self Resonant Frequency=100kHz, Supplier Part Number 1=513-1529-1-ND, Category="Fixed Inductors", ComponentLink1Description=https://datasheet.ciiva.com/46609/87246-46609257.pdf?src-supplier=Element14, ComponentLink1URL=https://datasheet.ciiva.com/46609/87246-46609257.pdf?src-supplier=Element14, Core Material=Ferrite, Depth=12.5mm, Height=6mm, Lead Free="Lead Free", Length=12.5mm, Manufacturer Part Number=DR125-3R3-R, Military Standard=Not, Mount="Surface Mount", Number of Pins=2, Packaging="Tape and Reel", Pricing 1="1=1.86000, 10=1.71900, 25=1.57560, 50=1.34640, 100=1.20320, 250=1.03132 (USD)", Radiation Hardening=No, REACH SVHC="No SVHC", RoHS=Yes, Saturation Current=12.7A, Shielding=Shielded, Stock 1=1813, Supplier 1=Digi-Key, Termination=SMD/SMT, Test Frequency=100kHz, Tolerance=20%, Weight=0.144oz, Width=12.5mm
L2: library part DR125-2R2-R, "FIXED IND 2.2UH 10.9A 4.5 MOHM", Case/Package=Nonstandard, Current Rating=10.9A, DC Resistance (DCR)=4.5mR, Inductance=2.2uH, Inductance Tolerance=20%, Manufacturer="Eaton Cooper", Max Operating Temperature=125°C, Min Operating Temperature=-40°C, Package Quantity=600, Saturation Current=15A, Self Resonant Frequency=100kHz, Supplier Part Number 1=DR125-2R2-R-CUTT, Category="Fixed Inductors", ComponentLink1Description=https://datasheet.ciiva.com/14667/0900766b8116a153-14667792.pdf?src-supplier=RSComponents, ComponentLink1URL=https://datasheet.ciiva.com/14667/0900766b8116a153-14667792.pdf?src-supplier=RSComponents, ComponentLink2Description=https://datasheet.ciiva.com/26926/getdatasheetpartid-571249-26926912.pdf?src-supplier=Verical, ComponentLink2URL=https://datasheet.ciiva.com/26926/getdatasheetpartid-571249-26926912.pdf?src-supplier=Verical, ComponentLink3Description=https://datasheet.ciiva.com/8004/87246-8004874.pdf?src-supplier=Element14, ComponentLink3URL=https://datasheet.ciiva.com/8004/87246-8004874.pdf?src-supplier=Element14, Composition=Wirewound, Core Material=Ferrite, DC Current=10.9A, Depth=12.5mm, Height=6mm, Height - Seated (Max)=0.236inch, Lead Free="Lead Free", Length=12.5mm, Manufacturer Part Number=DR125-2R2-R, Max DC Current=10.9A, Military Standard=Not, Mount="Surface Mount", Number of Pins=2, Packaging="Tape and Reel", Pricing 1="1=2.17000, 25=1.69000, 50=1.60000, 100=1.52000, 250=1.41000 (USD)", Radiation Hardening=No, REACH SVHC="No SVHC", RMS Current (Irms)=10.9A, RoHS=Yes, Shielding=Shielded, Stock 1=700, Supplier 1="Future Electronics", Termination=SMD/SMT, Test Frequency=100kHz, Tolerance=20%, Weight=0.144oz, Width=0.492inch
Q1 Q2: "MOSFET 2N-CH 30V 5.8A 8-SOIC", Case/Package=SO, Continuous Drain Current (ID)=8.2A, Drain to Source Resistance=11.5mR, Drain to Source Voltage (Vdss)=30V, Gate to Source Voltage (Vgs)=20V, Manufacturer="Vishay Siliconix", Max Operating Temperature=150°C, Max Power Dissipation=1.25W, Min Operating Temperature=-55°C, On-State Resistance=18.5mR, Package Quantity=1, Supplier Part Number 1=SI4816BDY-T1-E3CT-ND, Threshold Voltage=1V, Category=MOSFETs, ComponentLink1Description=https://datasheet.ciiva.com/15137/getdatasheetpartid-99188-15137841.pdf?src-supplier=Verical, ComponentLink1URL=https://datasheet.ciiva.com/15137/getdatasheetpartid-99188-15137841.pdf?src-supplier=Verical, ComponentLink2Description=https://datasheet.ciiva.com/7710/si4816bd-7710449.pdf?src-supplier=Element14, ComponentLink2URL=https://datasheet.ciiva.com/7710/si4816bd-7710449.pdf?src-supplier=Element14, ComponentLink3Description=https://datasheet.ciiva.com/26789/si4816bdy-t1-e3-26789112.pdf?src-supplier=IIIC, ComponentLink3URL=https://datasheet.ciiva.com/26789/si4816bdy-t1-e3-26789112.pdf?src-supplier=IIIC, ComponentLink4Description=https://datasheet.ciiva.com/11161/si4816bd-11161496.pdf?src-supplier=Avnet, ComponentLink4URL=https://datasheet.ciiva.com/11161/si4816bd-11161496.pdf?src-supplier=Avnet, ComponentLink5Description=https://datasheet.ciiva.com/928/si4816bd-928460.pdf?src-supplier=Digi-Key, ComponentLink5URL=https://datasheet.ciiva.com/928/si4816bd-928460.pdf?src-supplier=Digi-Key, ComponentLink6Description=https://datasheet.ciiva.com/16486/si4816bd-16486349.pdf?src-supplier=Future+Electronics, ComponentLink6URL=https://datasheet.ciiva.com/16486/si4816bd-16486349.pdf?src-supplier=Future+Electronics, ComponentLink7Description=https://datasheet.ciiva.com/26136/si4816bd-26136990.pdf?src-supplier=Avnet+Europe, ComponentLink7URL=https://datasheet.ciiva.com/26136/si4816bd-26136990.pdf?src-supplier=Avnet+Europe, ComponentLink8Description=https://datasheet.ciiva.com/18448/70026226-18448822.pdf?src-supplier=Allied+Electronics, ComponentLink8URL=https://datasheet.ciiva.com/18448/70026226-18448822.pdf?src-supplier=Allied+Electronics, ComponentLink9Description=https://datasheet.ciiva.com/928/si4816bd-928458.pdf?src-supplier=Digi-Key, ComponentLink9URL=https://datasheet.ciiva.com/928/si4816bd-928458.pdf?src-supplier=Digi-Key, ComponentLink10Description=https://datasheet.ciiva.com/928/si4816bd-928459.pdf?src-supplier=Digi-Key, ComponentLink10URL=https://datasheet.ciiva.com/928/si4816bd-928459.pdf?src-supplier=Digi-Key, Element Configuration=Single, Fall Time=9ns, FET Type="2 N-Channel", Height=1.55mm, Lead Free="Lead Free", Length=5mm, Manufacturer Part Number=SI4816BDY-T1-E3, Mount="Surface Mount", Nominal Vgs=3V, Number of Channels=2, Number of Elements=2, Number of Pins=8, Packaging="Tape and Reel", Pricing 1="1=1.56000, 10=1.40500, 25=1.32520, 100=1.03350, 500=0.87450, 1000=0.74200 (USD)", Radiation Hardening=No, Rds On Max=18.5mR, REACH SVHC=Unknown, Rise Time=9ns, RoHS=Yes, Stock 1=4053, Supplier 1=Digi-Key, Turn-Off Delay Time=31ns, Turn-On Delay Time=13ns, Weight=0.006596oz, Width=4mm
R1 R2 R13 R15: library part AC0805JR-070RL, "Thick Film Resistors - SMD 1/8W 0.0ohm 5%", Case Code (Imperial)=0805, Case Code (Metric)=2012, Manufacturer=Yageo, Max Operating Temperature=155°C, Max Power Dissipation=125mW, Min Operating Temperature=-55°C, Resistance=0mR, Supplier Part Number 1=YAG3755CT-ND, Temperature Coefficient=200ppm/°C, Tolerance=5%, Voltage Rating=150V, Case/Package=0805, Category="Chip SMD Resistors", ComponentLink1Description=http://www.yageo.com/documents/recent/PYu-AC_51_RoHS_L_2.pdf?src-supplier=Mouser, ComponentLink1URL=http://www.yageo.com/documents/recent/PYu-AC_51_RoHS_L_2.pdf?src-supplier=Mouser, ComponentLink2Description=http://www.yageo.com/NewPortal/yageodocoutput?fileName=/pdf/R-Chip/PYu-AC_51_RoHS_L_6.pdf&src-supplier=Digi-Key, ComponentLink2URL=http://www.yageo.com/NewPortal/yageodocoutput?fileName=/pdf/R-Chip/PYu-AC_51_RoHS_L_6.pdf&src-supplier=Digi-Key, Composition="Thick Film", Features="Moisture Resistant,Automotive AEC-Q200", Height=0.024inch, Lead Free="Lead Free", Length=0.079inch, Manufacturer Part Number=AC0805JR-070RL, Number of Terminations=2, Packaging="Tape and Reel", Power Rating=125mW, Pricing 1="1=0.10000, 10=0.04000, 25=0.02880, 50=0.02180, 100=0.01610, 250=0.01228, 500=0.00982, 1000=0.00723 (USD)", RoHS=Yes, Stock 1=68620, Supplier 1=Digi-Key, Termination=SMD/SMT, Width=1.25mm
R3: library part AC0805FR-0710RL, "Res Thick Film 0805 10 Ohm 1% 0.125W(1/8W) ±200ppm/C Sulfur Resistant Molded SMD Automotive Paper T/R", Case Code (Imperial)=0805, Case Code (Metric)=2012, Manufacturer=Yageo, Max Operating Temperature=155°C, Max Power Dissipation=125mW, Min Operating Temperature=-55°C, Supplier Part Number 1=YAG3690CT-ND, Temperature Coefficient=200ppm/°C, Tolerance=1%, Voltage Rating=150V, Case/Package=0805, Category="Chip SMD Resistors", ComponentLink1Description=http://www.mouser.com/ds/2/447/yageodocoutput-1111992.pdf?src-supplier=Mouser, ComponentLink1URL=http://www.mouser.com/ds/2/447/yageodocoutput-1111992.pdf?src-supplier=Mouser, ComponentLink2Description=http://components.arrow.com/part/dataview/0323_03350463?src-supplier=Arrow+Europe, ComponentLink2URL=http://components.arrow.com/part/dataview/0323_03350463?src-supplier=Arrow+Europe, ComponentLink3Description=http://www.yageo.com/NewPortal/yageodocoutput?fileName=/pdf/R-Chip/PYu-AC_51_RoHS_L_6.pdf&src-supplier=Digi-Key, ComponentLink3URL=http://www.yageo.com/NewPortal/yageodocoutput?fileName=/pdf/R-Chip/PYu-AC_51_RoHS_L_6.pdf&src-supplier=Digi-Key, ComponentLink4Description=http://www.yageo.com/documents/recent/PYu-AC_51_RoHS_L_2_revised.pdf?src-supplier=Future+Electronics, ComponentLink4URL=http://www.yageo.com/documents/recent/PYu-AC_51_RoHS_L_2_revised.pdf?src-supplier=Future+Electronics, Composition="Thick Film", Depth=1.25mm, Features="Moisture Resistant,Automotive AEC-Q200", Height=0.024inch, Lead Free="Lead Free", Length=2mm, Manufacturer Part Number=AC0805FR-0710RL, Military Standard=Not, Number of Terminations=2, Packaging="Tape and Reel", Power Rating=125mW, Pricing 1="1=0.10000, 10=0.08300, 100=0.03210, 1000=0.01410, 2500=0.01218 (USD)", Resistance=10R, RoHS=Yes, Stock 1=38355, Supplier 1=Digi-Key, Termination=SMD/SMT, Width=1.25mm
R4 R5: library part AC0805FR-071RL, "RES SMD 1 OHM 1% 1/8W 0805", Case Code (Imperial)=0805, Case Code (Metric)=2012, Manufacturer=Yageo, Max Operating Temperature=155°C, Max Power Dissipation=125mW, Min Operating Temperature=-55°C, Supplier Part Number 1=YAG3705CT-ND, Temperature Coefficient=200ppm/°C, Tolerance=1%, Voltage Rating=150V, Case/Package=0805, Category="Chip SMD Resistors", ComponentLink1Description=https://datasheet.ciiva.com/12576/pyu-ac-51-rohs-l-2-12576553.pdf?src-supplier=Mouser, ComponentLink1URL=https://datasheet.ciiva.com/12576/pyu-ac-51-rohs-l-2-12576553.pdf?src-supplier=Mouser, Composition="Thick Film", Features="Moisture Resistant,Automotive AEC-Q200", Height=0.024inch, Lead Free="Lead Free", Length=0.079inch, Manufacturer Part Number=AC0805FR-071RL, Number of Terminations=2, Packaging="Tape and Reel", Power Rating=125mW, Pricing 1="1=0.10000, 10=0.08300, 100=0.03210, 1000=0.01410, 2500=0.01218 (USD)", Resistance=1R, RoHS=Yes, Stock 1=14398, Supplier 1=Digi-Key, Termination=SMD/SMT, Weight=0.000194oz, Width=0.049inch
R6 R7 R9 R10: library part AC0805FR-07200KL, "Res Thick Film 0805 200K Ohm 1% 0.125W(1/8W) ±100ppm/C Epoxy Pad SMD Automotive T/R", Case Code (Imperial)=0805, Case Code (Metric)=2012, Manufacturer=Yageo, Max Operating Temperature=155°C, Max Power Dissipation=125mW, Min Operating Temperature=-55°C, Resistance=200kR, Supplier Part Number 1=YAG3706CT-ND, Temperature Coefficient=100ppm/°C, Tolerance=1%, Voltage Rating=150V, Case/Package=0805, Category="Chip SMD Resistors", ComponentLink1Description=http://www.mouser.com/ds/2/447/yageodocoutput-1111992.pdf?src-supplier=Mouser, ComponentLink1URL=http://www.mouser.com/ds/2/447/yageodocoutput-1111992.pdf?src-supplier=Mouser, ComponentLink2Description=http://www.yageo.com/NewPortal/yageodocoutput?fileName=/pdf/R-Chip/PYu-AC_51_RoHS_L_6.pdf&src-supplier=Digi-Key, ComponentLink2URL=http://www.yageo.com/NewPortal/yageodocoutput?fileName=/pdf/R-Chip/PYu-AC_51_RoHS_L_6.pdf&src-supplier=Digi-Key, ComponentLink3Description=http://www.yageo.com/documents/recent/PYu-AC_51_RoHS_L_2.pdf?src-supplier=Future+Electronics, ComponentLink3URL=http://www.yageo.com/documents/recent/PYu-AC_51_RoHS_L_2.pdf?src-supplier=Future+Electronics, Composition="Thick Film", Features="Moisture Resistant,Automotive AEC-Q200", Height=0.024inch, Lead Free="Lead Free", Length=0.079inch, Manufacturer Part Number=AC0805FR-07200KL, Number of Terminations=2, Packaging="Tape and Reel", Power Rating=125mW, Pricing 1="1=0.10000, 10=0.04700, 100=0.01900, 1000=0.00853, 2500=0.00741 (USD)", RoHS=Yes, Stock 1=10614, Supplier 1=Digi-Key, Termination=SMD/SMT, Width=0.049inch
R8 R11: library part AC0805FR-0710KL, "RES SMD 10K OHM 1% 1/8W 0805", Case Code (Imperial)=0805, Case Code (Metric)=2012, Manufacturer=Yageo, Max Operating Temperature=155°C, Max Power Dissipation=125mW, Min Operating Temperature=-55°C, Package Quantity=1, Resistance=10kR, Supplier Part Number 1=311-10KLGCT-ND, Temperature Coefficient=100ppm/°C, Tolerance=1%, Voltage Rating=150V, Case/Package=0805, Category="Chip SMD Resistors", ComponentLink1Description=https://datasheet.ciiva.com/5558/pyu-ac-51-rohs-l-2-5558347.pdf?src-supplier=Mouser, ComponentLink1URL=https://datasheet.ciiva.com/5558/pyu-ac-51-rohs-l-2-5558347.pdf?src-supplier=Mouser, Composition="Thick Film", Depth=1.25mm, Features="Moisture Resistant,Automotive AEC-Q200,Anti-Sulfur", Height=0.024inch, Lead Free="Lead Free", Length=0.079inch, Manufacturer Part Number=AC0805FR-0710KL, Military Standard=Not, Number of Terminations=2, Packaging="Tape and Reel", Power Rating=125mW, Pricing 1="1=0.10000, 10=0.04700, 100=0.01900, 1000=0.00853, 2500=0.00741 (USD)", RoHS=Yes, Stock 1=540969, Supplier 1=Digi-Key, Termination=SMD/SMT, Width=0.049inch
R12 R14 R16 R17 R18: library part RES
U1: "IC MAIN PWR CTRLR QUAD 32-QFN", Case/Package=QFN, Manufacturer=Intersil, Max Operating Temperature=100°C, Min Operating Temperature=-40°C, Output Current=20A, Package Quantity=60, Switching Frequency=500kHz, Category="Voltage Regulators - Switching", ComponentLink1Description=https://datasheet.ciiva.com/25905/fn6453-25905351.pdf?src-supplier=Avnet+Europe, ComponentLink1URL=https://datasheet.ciiva.com/25905/fn6453-25905351.pdf?src-supplier=Avnet+Europe, Height=0.95mm, Lead Free="Lead Free", Length=5mm, Manufacturer Part Number=ISL6236AIRZ, Mount="Surface Mount", Number of Outputs=2, Packaging=Rail/Tube, Pricing 1="600=3.10391, 720=3.03600, 1320=2.99000, 3000=2.94400, 6000=2.89800 (USD)", Radiation Hardening=No, RoHS=Yes, Supplier 1=Avnet, Supplier Part Number 1=ISL6236AIRZ, Width=5mm

## Via types
v1: diameter 0.6, hole 0.3, L1 to L6, tented both sides, 94 vias

## Nets (pads, with @x,y where several pads share a name; then routed paths per layer and width w, separated by ;. In a path a pad name is that pad's centre, name@x,y a point inside that pad or via, vN(x,y) a via of type N, cw(c..) or ccw(c..) an arc to the next point about the centre after c; other vN are vias at no path point)
+1.5V: C9.1 J3.1 L1.1 R12.2 U1.10 | length 17.4
  L3 w1: v1(30.85,19.55) 30.95,19.55 v1(38.7,11.8)
  L6 w0.2: U1.10 26.25,21.85 26.7,21.4 27.55,21.4 27.7,21.25
  L6 w0.5: 27.7,21.25 29.4,19.55 R12.2 v1(30.85,19.55)
+1.05V: C10.1 J4.1 L2.2 U1.30 | length 18.6
  L3 w1: v1(25.4,28.8) 32.2,35.6 35.95,35.6 v1(38.55,38.2)
  L6 w0.2: v1(25.4,28.8) 25.4,28.692 25.75,28.342 U1.30
+5V_LDO: C1.2 R1.2 U1.7 | length 25.5
  L3 w1: v1(12.6,25) 18.7,25 19.4,24.3 22.2,24.3 22.9,25 28,25 v1@30.025,22.975
  L6 w0.2: U1.7 28.133,23.75 28.6,23.283
  L6 w0.5: v1(12.6,25) R1.2 ; 28.6,23.283 28.6,22 28.9,21.7 C1.2 ; C1.2@30.125,21.725 v1(30.125,22.975)
+5V_PVCC: C3.2 R1.1 R2.2 R3.1 U1.19 | length 12.7
  L6 w0.2: 21.4,24.25 U1.19
  L6 w0.5: C3.2 20.626,24.6 20.976,24.25 21.4,24.25
  L6 w0.7: R1.1 R2.2 R3.1 ; 15.6,25.9 19.19,25.9 19.6,25.49 19.6,24.7 C3.2
+5V_VCC: C4.2 R3.2 R8.2 R9.2 R10.2 R11.2 R13.2 R16.2 U1.2 U1.3 U1.20 | length 16.7
  L6 w0.2: v1(21.5,25.3) 22.05,24.75 U1.20 ; U1.3 28.05,25.75 28.8,26.5 28.8,26.9 ; U1.2 27.883,26.25 28,26.367 v1(28,27.3)
  L6 w0.5: v1(12.6,29.6) R3.2 ; v1(12.6,32.4) R9.2 ; v1(12.6,34.7) R10.2 ; v1(22.8,16.6) R11.2 ; R16.2 v1(27.35,36.85) ; v1(27.4,16.6) R13.2 ; 28.8,26.9 28.8,28.05 30.15,29.4 C4.2 v1(30.15,30.65) ; v1(28.9,35.8) R8.2
+REF: C12.1 R14.2 U1.1 | length 10.7
  L6 w0.2: U1.1 27.4,27.95
  L6 w0.5: R14.2 C12.1 30.15,32.15 27.9,29.9 27.9,28.9 27.4,28.4 27.4,27.95
+VIN: C2.2 C5.2 C6.2 J1.1 Q1.8 Q2.8 R2.1 U1.6 | length 6.7
  L6 w0.2: U1.6 28.9,24.25
  L6 w0.5: v1(12.5,28.5) 12.5,28 12.895,27.605 13.55,27.605 13.65,27.505 R2.1 ; 28.9,24.25 30.1,24.25 C2.2 30.15,25.05 30.4,25.3 v1(31.1,25.3)
+VREF3: C11.1 R15.2 U1.5 | length 24.9
  L6 w0.2: U1.5 28.6,24.75 29,25.15
  L6 w0.5: R15.2 R15.2@27.6,38.1 ; 29,25.15 30.15,26.3 C11.1
  L6 w0.9: R15.2@27.6,38.1 32.6,38.1 34.7,36 34.7,28.327 34.173,27.8 31.25,27.8 30.15,26.7 C11.1
EN1: R11.1 U1.14 | length 3.7
  L6 w0.2: R11.1 22.8,20.1 24.25,21.55 U1.14
EN_LDO: R8.1 U1.4 | length 16.7
  L6 w0.2: U1.4@27.5,25.25 28.25,25.25 29.4,26.4 29.4,27.3 30.75,28.65 33.35,28.65 33.8,29.1 33.8,35.1 33.1,35.8 R8.1
FB1: R12.1 R13.1 R17.2 U1.11 | length 10.3
  L6 w0.2: U1.11 25.75,21.25 25.806,21.194 25.975,21.025
  L6 w0.5: 25.975,21.025 26.2,20.8 26.834,20.8 27.4,20.234 R13.1 27.45,19.5 28.2,19.5 28.6,19.1 28.6,17.8 28.75,17.65 R12.1 R17.2
GND: C1.1 C2.1 C3.1 C4.1 C5.1 C6.1 C9.2 C10.2 C11.2 C12.2 J2.1 J5.1 J6.1 Q1.2 Q1.3 Q2.2 Q2.3 R6.2 R7.1 R17.1 R18.1 U1.8 U1.21 U1.22 U1.29 U1.33 | length 12.5
  L6 w0.2: U1.21 U1.33@24.75,25.25 ; U1.22 24.25,25.75 U1.33@24.75,25.25 ; v1(24.5,29.5) 24.5,28.75 25.25,28 U1.29 ; U1.33 U1.33@24.75,25.25 ; U1.8 27.4,22.7 27.6,22.5 v1(27.6,22.3)
  L6 w0.5: v1(24.75,31.55) R6.2 ; v1(25.1,16.6) R7.1 ; R18.1 v1(28.4,40.4) ; R17.1 v1(33.05,19.55)
  other v1: 8.6,9.5 10.6,9.5 9.6,10.5 8.6,11.5 10.6,11.5 9.6,12.5 8.6,13.5 9.3,14.5 10.4,14.548 10.4,15.4 8.6,15.5 36.9,18.5 40.3,18.5 14.2,19 14.2,20 14.2,21 36.9,21 40.3,21 34.1,21.3 37.8,22 39.4,22 34.1,22.2 17.35,23.6 18.25,23.6 32.9,23.8 24,24 26,24 32.9,24.5 24,26 26,26 32.9,26.1 32.9,26.8 37.8,28 39.4,28 36.9,29 40.3,29 31.6,30.7 32.5,30.7 36.9,31.5 40.3,31.5 31.6,32.5 32.5,32.5 9,33 11,33 10,34 9,35 11,35 10,36 9,37 9.5,38 10.4,38 9,39 10.4,39 19,43 19,44 19,45
LGATE1: Q1.4 U1.18 | length 21.3
  L1 w0.2: v1(13.395,13.095) v1@13.4,13.09
  L1 w0.5: Q1.4@12.173,13.095 v1(13.395,13.095)
  L3 w1: v1(13.395,13.095) 12.1,14.39 12.1,21 13.4,22.3 20.642,22.3 v1(21.242,22.9)
  L6 w0.2: 21.821,23.479 22.092,23.75 U1.18
  L6 w0.5: v1(21.242,22.9) 21.821,23.479
LGATE2: Q2.4 U1.23 | length 17.4
  L1 w0.2: v1(13.795,36.595) v1@13.8,36.59
  L1 w0.5: Q2.4@12.573,36.595 v1(13.795,36.595)
  L3 w1: v1(13.795,36.595) 14.314,36.595 14.9,36.009 14.9,30.8 19.4,26.3 v1(21.1,26.3)
  L6 w0.2: v1(21.1,26.3) 21.15,26.25 U1.23
NetC7_2: C7.2 R4.1 | length 2.4
  L6 w0.2: C7.2 17.8,21 18,21.2 R4.1
NetC8_1: C8.1 R5.2 | length 2.4
  L6 w0.2: C8.1 17.8,28.55 18,28.35 R5.2
NetR4_2: R4.2 U1.17 | length 3.1
  L6 w0.2: R4.2 21.491,22.3 21.842,22.651 21.842,22.677 22.415,23.25 U1.17
NetR5_1: R5.1 U1.24 | length 2.9
  L6 w0.2: R5.1 21.2,27.3 21.75,26.75 U1.24
NetR6_1: R6.1 U1.31 | length 2.4
  L6 w0.2: R6.1 25.931,29.519 25.931,29.117 26.25,28.799 U1.31
NetR7_2: R7.2 U1.12 | length 3.1
  L6 w0.2: R7.2 25.1,20.4 25.25,20.55 U1.12
PHASE1: C7.1 L1.2 Q1.5 Q1.6 Q1.7 U1.16 | length 12.5
  L3 w1: v1(19,13.1) 19.7,13.8 v1(19.7,18.6)
  L6 w0.2: 22.7,22.6 U1.16
  L6 w0.5: v1(19.7,18.6) C7.1 21.3,20 22.1,20.8 22.1,21.461 22.7,22.061 22.7,22.6
PHASE2: C8.2 L2.1 Q2.5 Q2.6 Q2.7 U1.25 | length 12.1
  L3 w1: v1(19.2,36.6) 19.7,36.1 v1(19.7,30.8)
  L6 w0.2: 22.4,27.4 U1.25
  L6 w0.5: v1(19.7,30.8) C8.2 20.859,29.6 21.8,28.659 21.8,28 22.4,27.4
POK1: R9.1 U1.13 U1.27 | length 37.6
  L3 w0.2: v1(23.3,30.4) 23.3,29.3 24.7,27.9 30.3,27.9 31.8,26.4 31.8,22 30.5,20.7 v1(24.4,20.7)
  L6 w0.2: R9.1 22.1,32.4 23.3,31.2 23.3,28.786 24.086,28 24.248,27.838 24.248,27.402 U1.27 ; v1(24.4,20.7) 24.75,21.05 U1.13
POK2: R10.1 U1.28 | length 15
  L6 w0.2: R10.1 22.2,34.7 23.9,33 23.9,29.249 23.9,28.751 24.251,28.4 24.75,27.901 U1.28
REINF2: R14.1 R15.1 R16.1 R18.2 U1.32 | length 14.3
  L6 w0.2: U1.32 26.75,28.964 26.8,29.014
  L6 w0.5: R18.2 R15.1 R16.1 R14.1 25.55,33.4 25.55,32.793 25.843,32.5 26.707,32.5 27,32.207 27,29.214 26.8,29.014
UGATE1: Q1.1 U1.15 | length 14.3
  L1 w0.2: v1(13.395,16.905) v1@13.4,16.9
  L1 w0.5: Q1.1@12.173,16.905 v1(13.395,16.905)
  L3 w1: v1(13.395,16.905) 14.805,16.905 18.7,20.8 22.5,20.8 v1(23.4,21.7)
  L6 w0.2: v1(23.4,21.7) 23.75,22.05 U1.15
UGATE2: Q2.1 U1.26 | length 24.4
  L1 w0.5: v1(10.6,40.4) Q2.1
  L3 w1: v1(10.6,40.4) 14.8,40.4 17.4,37.8 17.4,30.986 19.386,29 v1(22.52,29) ; 11.351,40.405 11.356,40.4
  L6 w0.2: v1(22.52,29) 22.52,28.985 23.735,27.77 23.735,27.415 U1.26
pads on no net: U1.9

## Polygon pours and split planes (outlines as drawn)
GND on L1 "GND_L01_P028" (solid, pour order 28): 13.095,16.005 8.595,16.005 8.095,15.505 8.095,9.005 8.595,8.505 11.595,8.505 11.595,12.005 11.595,12.305 10.845,12.305 10.495,12.538 10.495,13.605 10.795,13.905 13.095,13.905
GND on L1 "GND_L01_P024" (solid, pour order 24): 13.5,39.5 9,39.5 8.5,39 8.5,32.5 9,32 12,32 12,35.5 12,35.8 11.25,35.8 10.9,36.033 10.9,37.1 11.2,37.4 13.5,37.4
GND on L1 "GND_L01_P023" (solid, pour order 23): 13.5,39.5
GND on L1 "GND_L01_P015" (solid, pour order 15): 40.7,17.7 36.5,17.7 36.5,22.4 40.7,22.4
GND on L1 "GND_L01_P013" (solid, pour order 13): 36.5,32.3 40.7,32.3 40.7,27.6 36.5,27.6
GND on L1 "GND_L01_P012" (solid, pour order 12): 36.5,32.5
GND on L1 "GND_L01_P011" (solid, pour order 11): 15.7,18.5 13.7,18.5 13.7,21.5 15.7,21.5
GND on L1 "GND_L01_P010" (solid, pour order 10): 17.5,45.5 19.5,45.5 19.5,42.5 17.5,42.5
GND on L1 "GND_L01_P009" (solid, pour order 9): 17.5,45.5
+VIN on L1 "+VIN_L01_P008" (solid, pour order 8): 17.5,45.5
+VIN on L1 "+VIN_L01_P007" (solid, pour order 7): 16.5,16.5 21.5,16.5 21.5,25 20,26.5 10,26.5 9.5,27 9.5,27.5 10,28 29,28 30,27 30,24.5 32.5,24.5 32.5,30.5 31.5,31.5 8.5,31.5 8,32 8,40 9,41 13.5,41 14.5,40 19,40 19,42 17,42 16,43 16,45 15,46 3,46 2,45 2,24 3.5,22.5 15.5,22.5 16.5,21.5
+1.05V on L1 "+1.05V_L01_P005" (solid, pour order 5): 30.3,33.7 30.3,39.8 34.8,39.8 36.23,38.5 47.2,38.5 47.2,33.7 37.1,33.7
+1.5V on L1 "+1.5V_L01_P004" (solid, pour order 4): 30.3,16.3 30.3,10.2 34.8,10.2 36.23,11.5 47.2,11.5 47.2,16.3 37.1,16.3
PHASE1 on L1 "PHASE1_L01_P003" (solid, pour order 3): 16.5,16 24.3,16 24.3,10.1 20.3,10.1 17.7,12.7 16.5,12.7
PHASE2 on L1 "PHASE2_L01_P002" (solid, pour order 2): 16.8,39.8 24.3,39.8 24.3,34.2 18.9,34.2 16.8,36.3
PHASE2 on L1 "PHASE2_L01_P001" (solid, pour order 1): 14.5,39.3
PHASE2 on L1 "PHASE2_L01_P000" (solid, pour order 0): 17,39.5
GND on L6 "GND_L06_P021" (solid, pour order 21): 18.65,25.3 18.65,23.2 16.95,23.2 16.95,25.3
GND on L6 "GND_L06_P020" (solid, pour order 20): 34.5,22.6 32.7,22.6 32.7,20.9 34.5,20.9
GND on L6 "GND_L06_P019" (solid, pour order 19): 33.3,24.9 31.5,24.9 31.5,23.4 33.3,23.4
GND on L6 "GND_L06_P018" (solid, pour order 18): 33.3,27.2 31.5,27.2 31.5,25.7 33.3,25.7
GND on L6 "GND_L06_P017" (solid, pour order 17): 31.2,28.9 31.2,31.1 32.9,31.1 32.9,28.9
GND on L6 "GND_L06_P016" (solid, pour order 16): 32.9,34.2 32.9,32.1 31.2,32.1 31.2,34.2
+5V_VCC on L4 "+5V_VCC_L04_P026" (solid, pour order 26): 7.5,5 42.5,5 42.5,45 7.5,45
GND on L2 (split plane): 49.49,0.51 0.51,0.51 0.51,49.49 49.49,49.49
GND on L5 (split plane): 49.49,0.51 0.51,0.51 0.51,49.49 49.49,49.49

## Other copper
L1:
  text "L" at 2,2 h2.5

## Silkscreen, mask and mechanical layers (free items; w line width, h text height)
Top Overlay:
  text "+OUT2" at 40.754,39.254 h1.52
  text "+VIN" at 1.754,32.504 h1.52
  text "GND" at 43.004,26.004 h1.52
  text "GND" at 43.004,22.504 h1.52
  text "GND" at 3.004,16.004 h1.52
  text "+OUT1" at 41.754,9.754 h1.52
Bottom Overlay:
  text "ISL6236A DEMO V1I1" at 41.65,45.85 h2
  text "1" at 28.7,26.5 h0.9
  text "© 2020 Parametric" at 17.5,2.521 h2
Top Solder:
  text "L" at 2,2 h2.5
Board Outline:
  the board outline again, w0.5

## Text inside footprints (layer, text, board x,y; h text height)
Q1: Top Overlay "1" at 11.2,18 h0.9 r270
Q2: Top Overlay "1" at 11.6,41.5 h0.9 r270